# Altium PCB OFDMT1.PcbDoc (part 1 of 4)
Units mm, origin at the board's own origin, x right, y up, seen from the top; angles counter-clockwise.
Board outline 40.21 x 28.18 mm, 6 copper layers (Top Layer, GND1, SIGNAL, POWER, GND2, Bottom Layer), stack 1.436 mm thick; 295 components, 218 nets, 1362 pads, 709 vias.
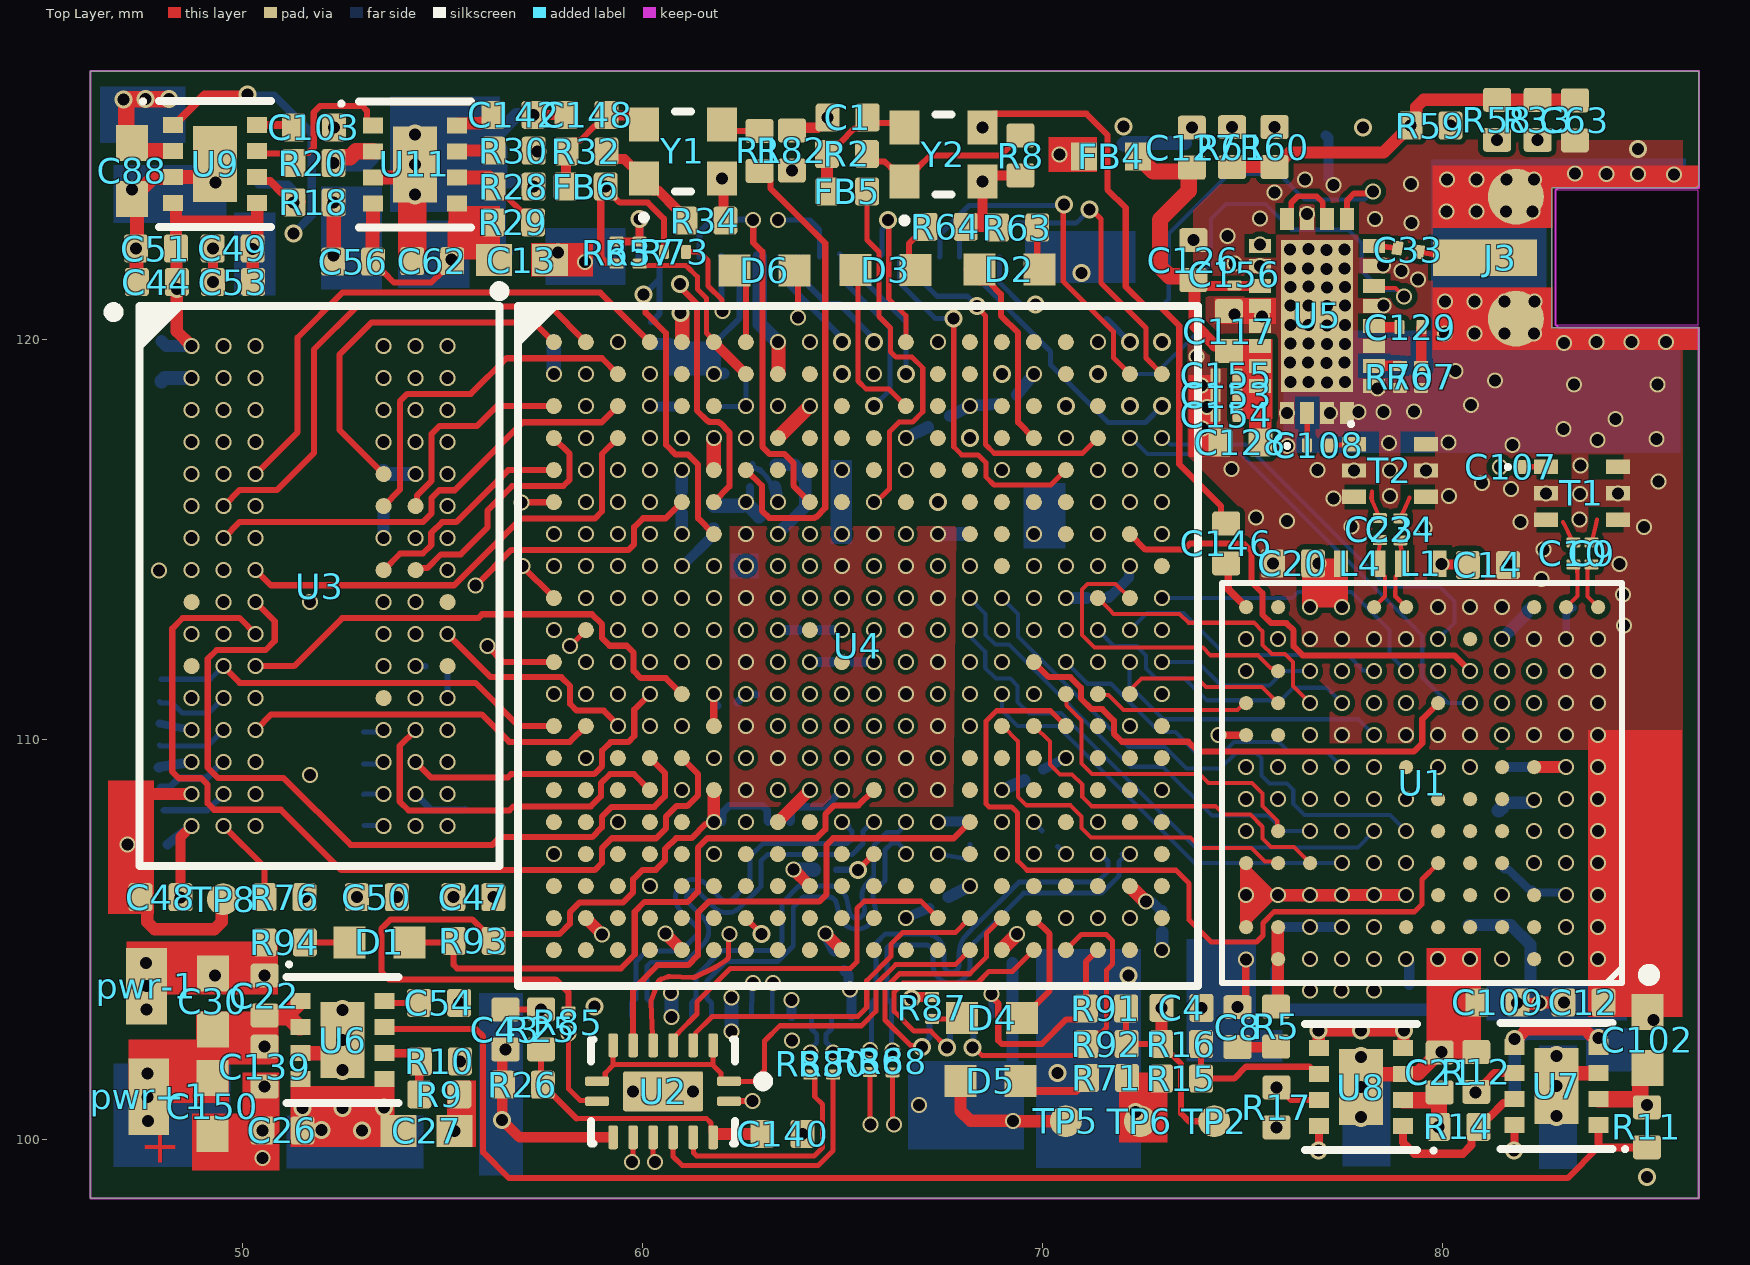
[diagram p0: Top Layer view]
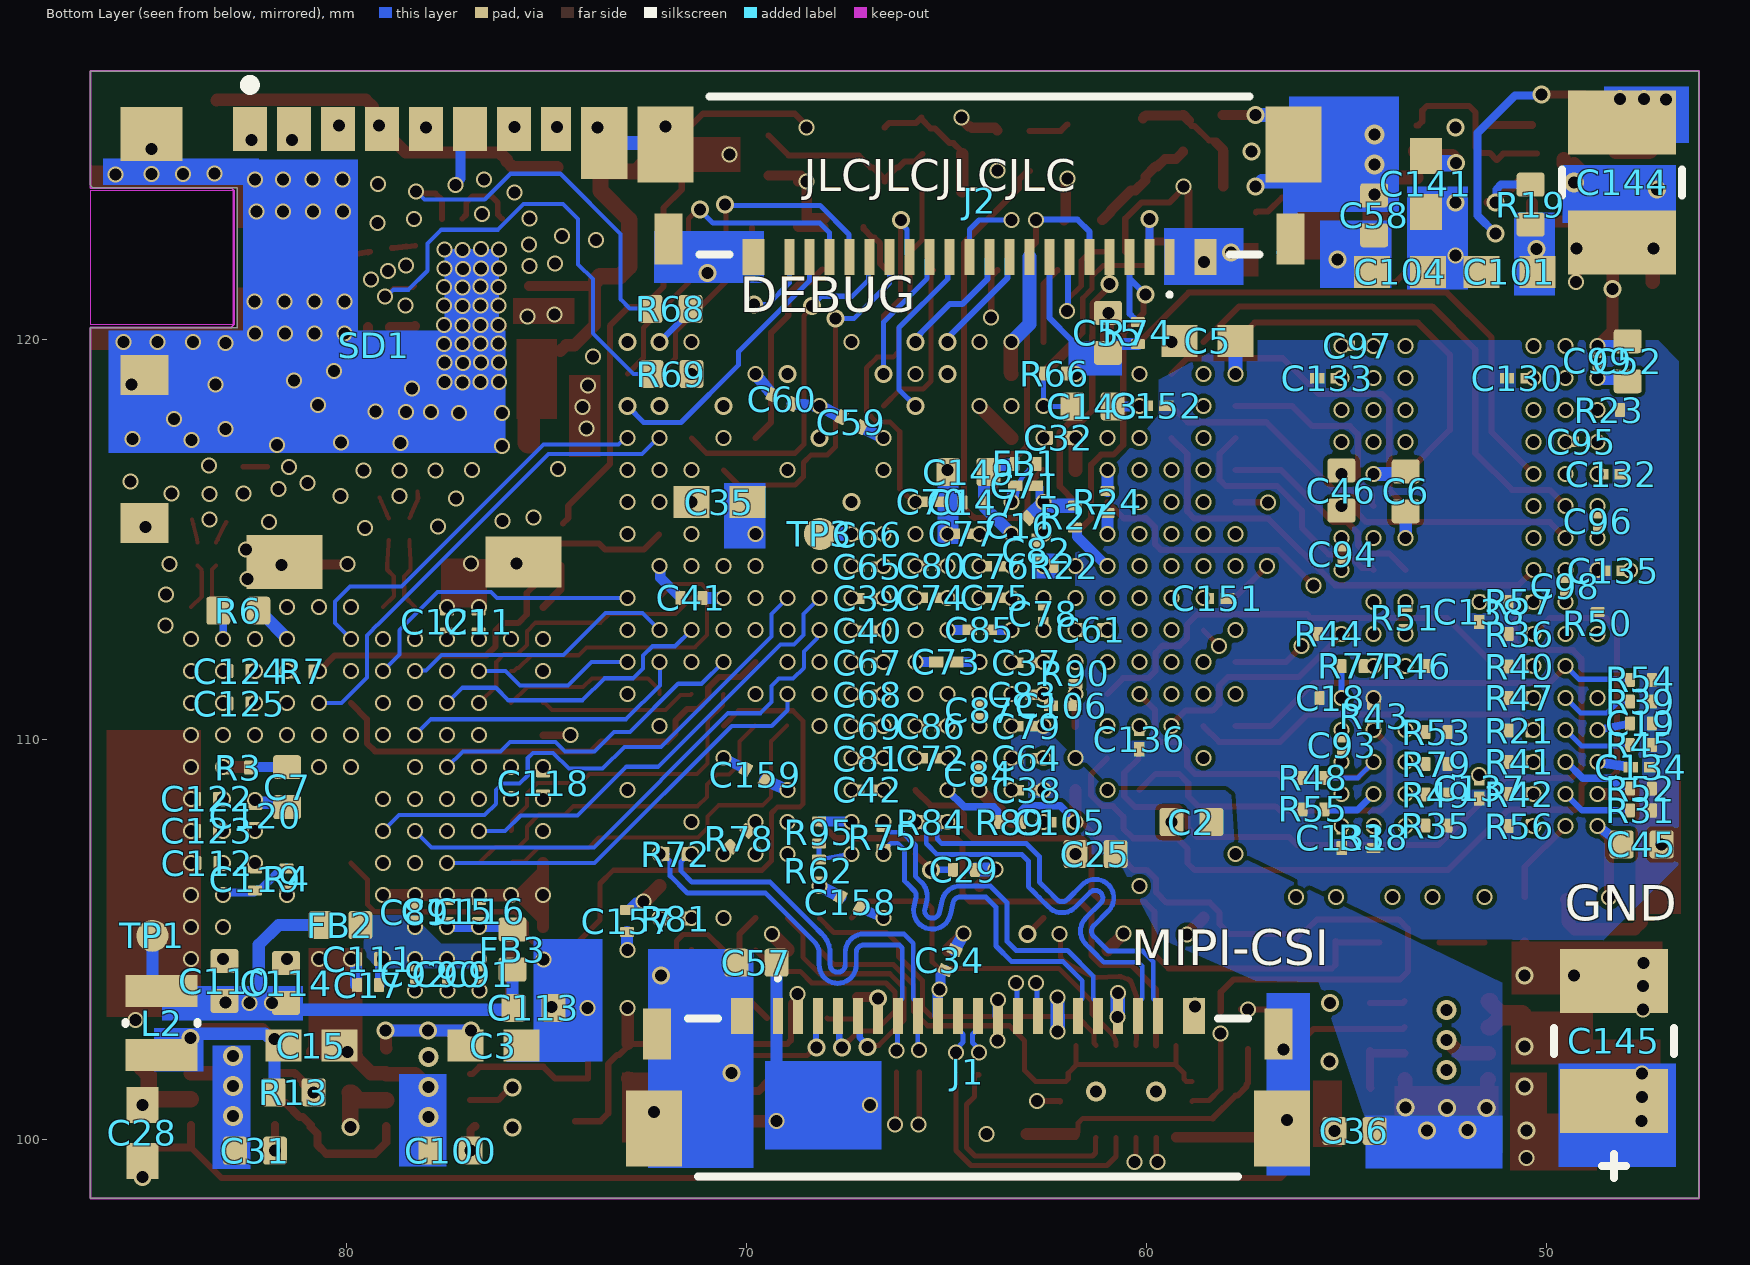
[diagram p1: Bottom Layer view, seen from below]
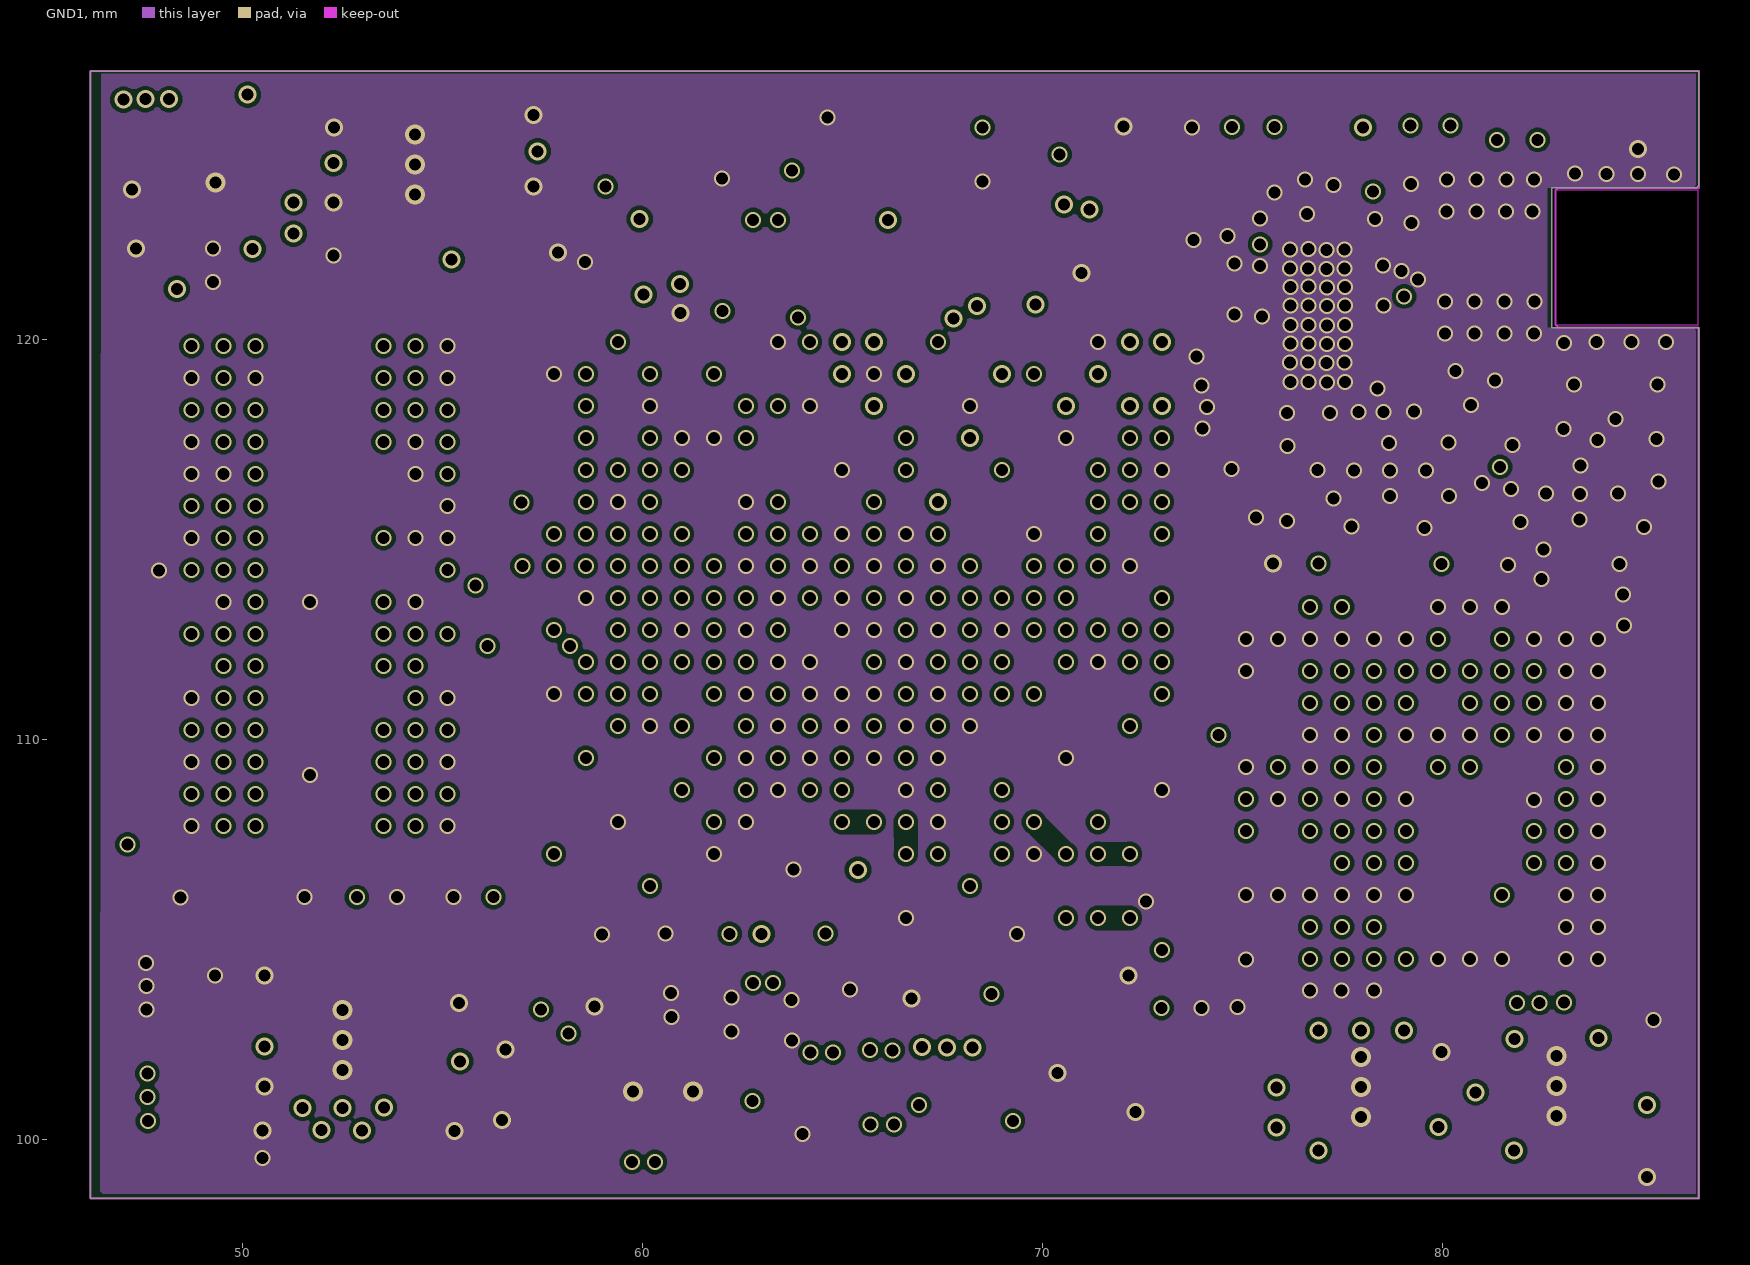
[diagram p2: GND1]
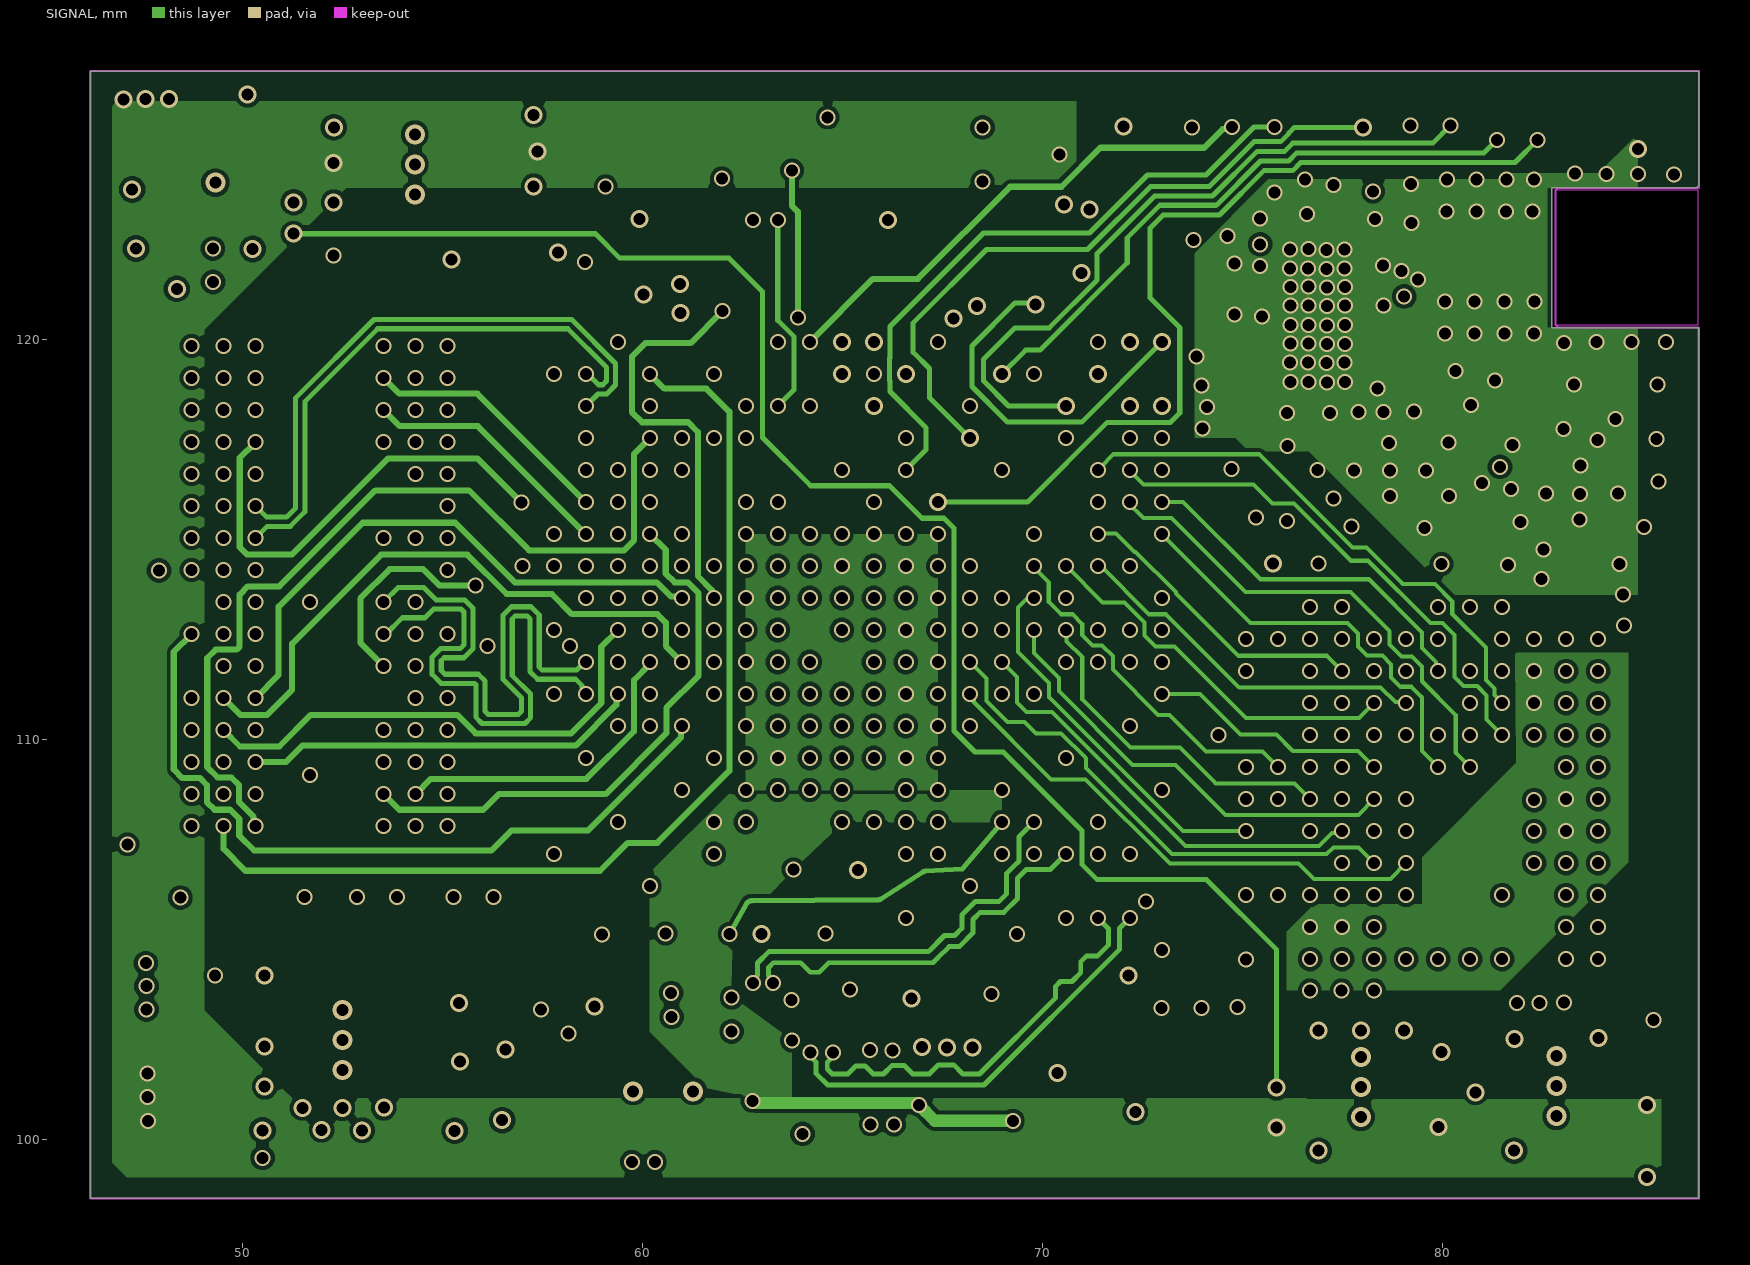
[diagram p3: SIGNAL]
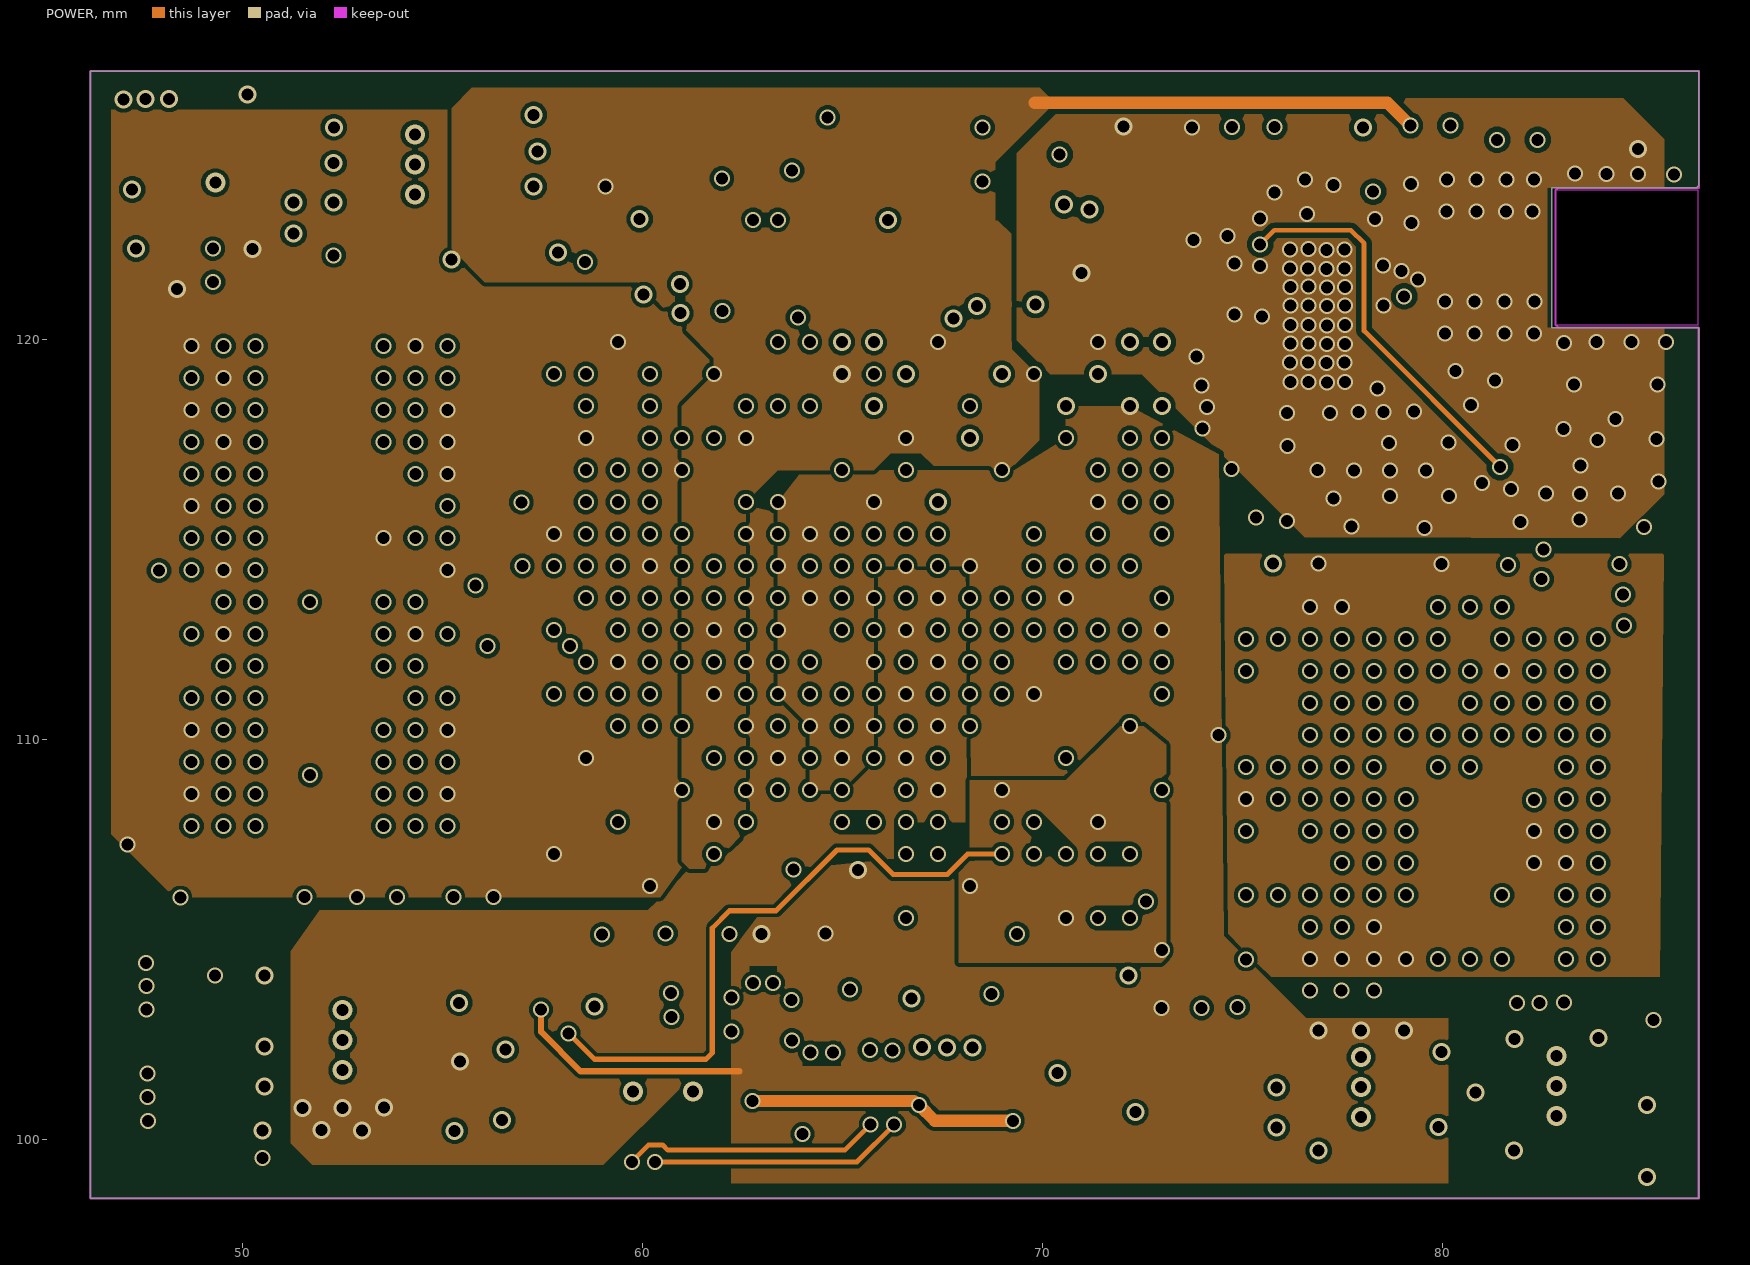
[diagram p4: POWER]
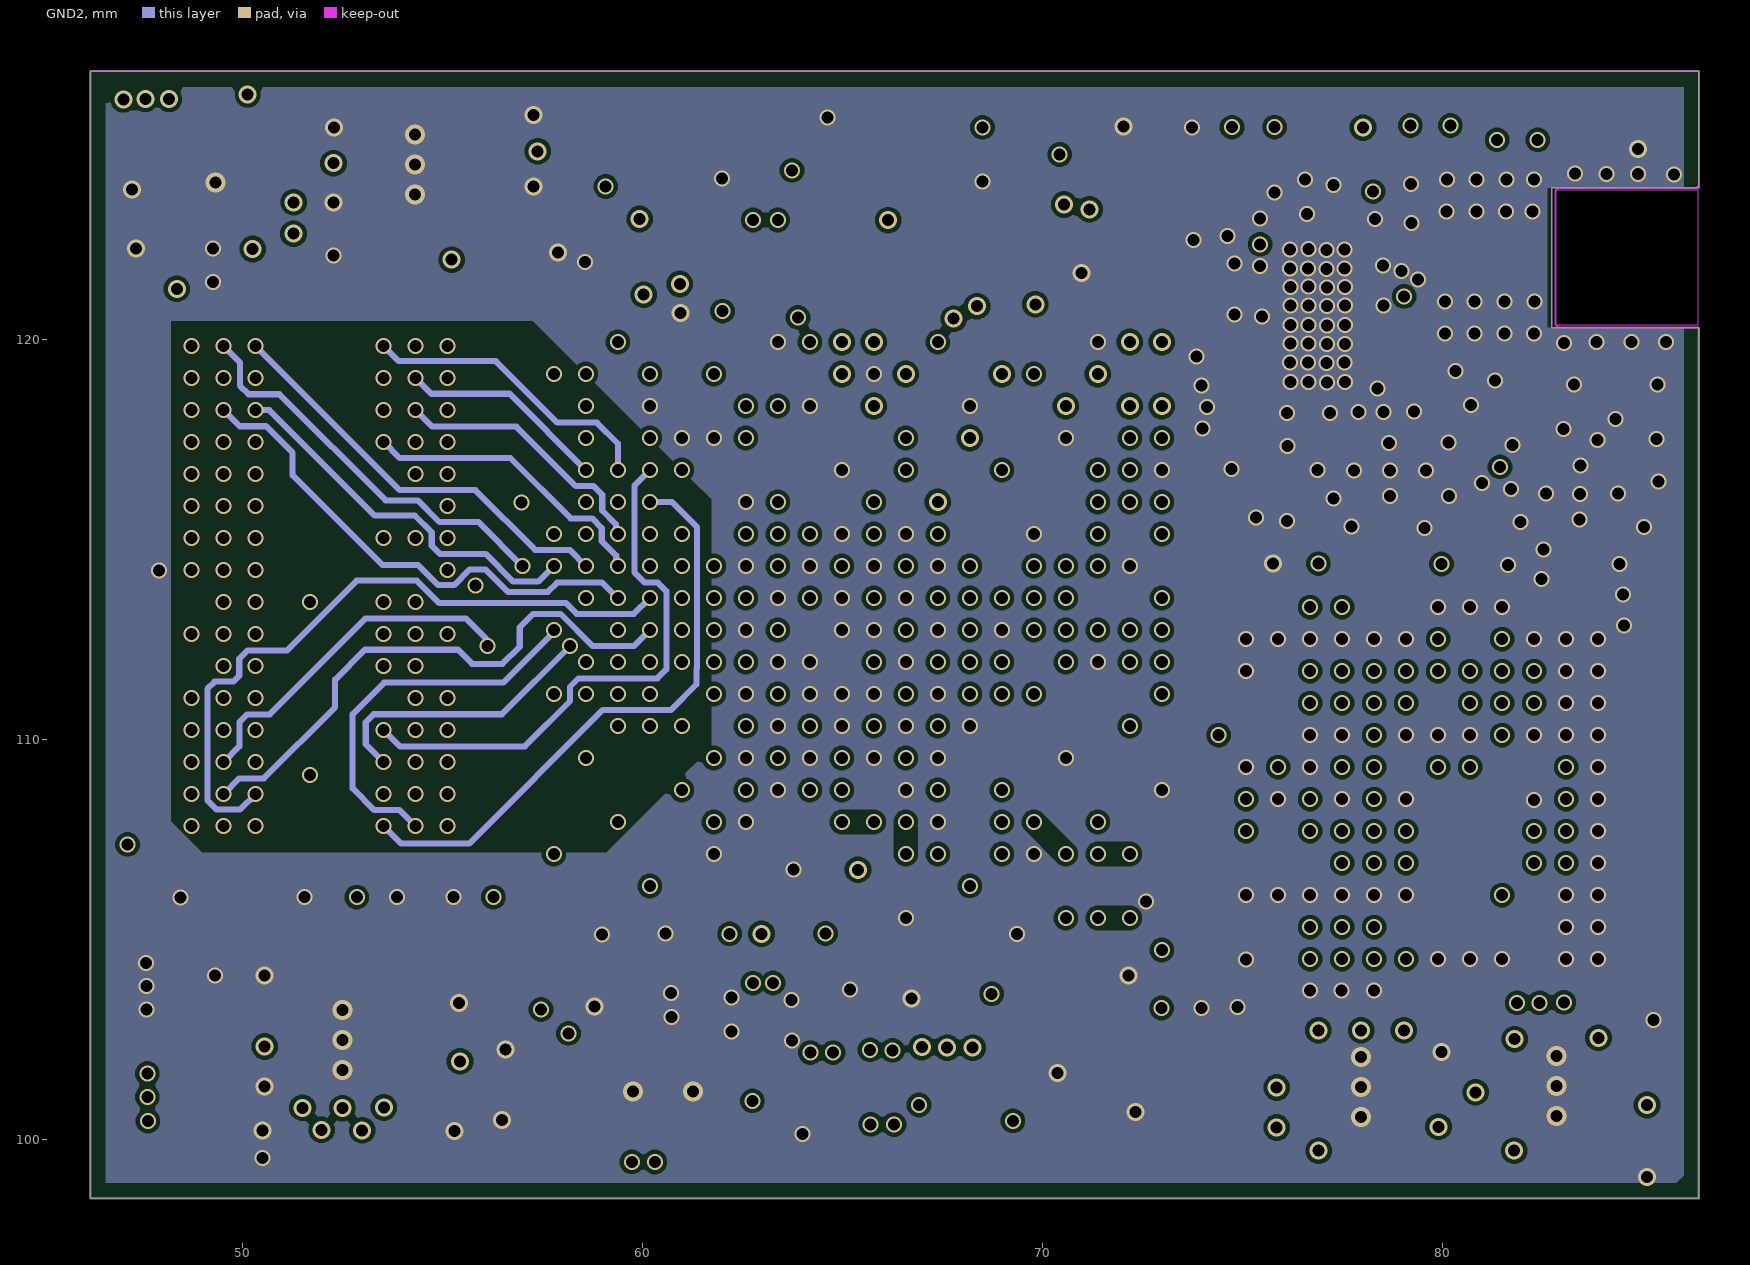
[diagram p5: GND2]
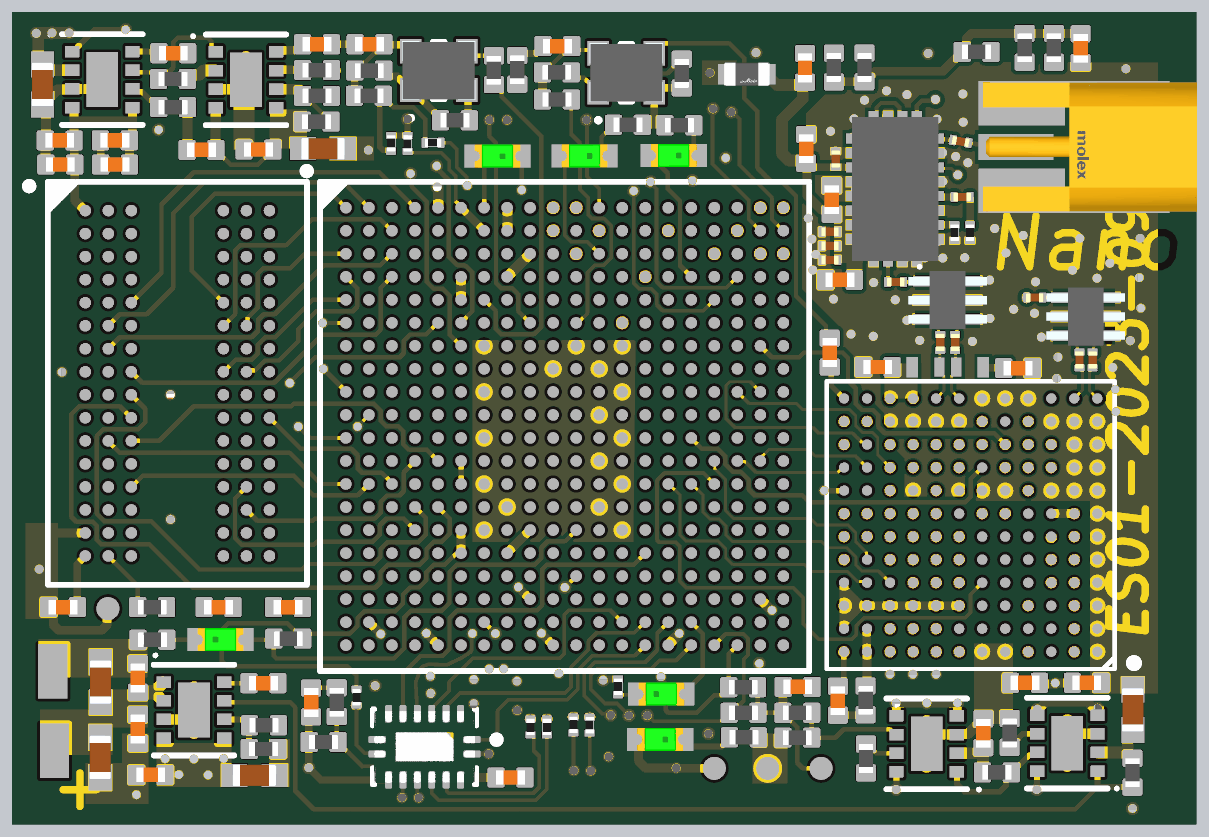
[diagram p8: 3D render of the assembled board from above, using the file's embedded part models]
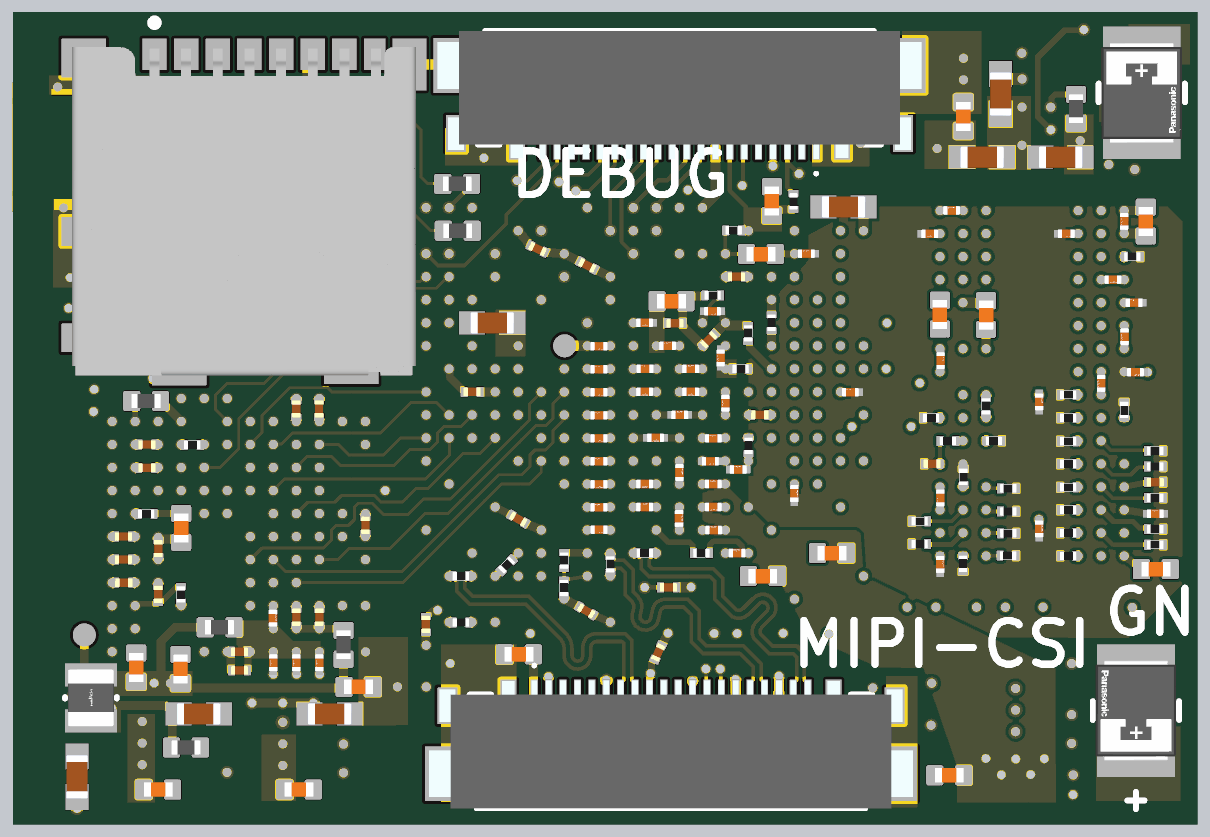
[diagram p9: 3D render of the assembled board from below, using the file's embedded part models]

## Layer stack, top to bottom
Top Solder: solder mask 0.0102, Solder Resist, Dk 3.5
Top Layer: signal copper 0.0356
Dielectric 2: prepreg 0.0711, PP-006, Dk 4.1
GND1: signal copper 0.035
Dielectric 4: prepreg 0.1411, PP-006, Dk 4.1
SIGNAL: signal copper 0.035
Dielectric 1: dielectric 0.8004, FR-4, Dk 4.8
POWER: signal copper 0.035
Dielectric 5: prepreg 0.1411, PP-006, Dk 4.1
GND2: signal copper 0.035
Dielectric 3: prepreg 0.0711, PP-006, Dk 4.1
Bottom Layer: signal copper 0.0356
Bottom Solder: solder mask 0.0102, Solder Resist, Dk 3.5

## Board outline
46.203,98.514 46.203,126.695 86.411,126.695 86.411,123.838 86.36,123.787 82.74,123.787 82.74,120.282 86.411,120.282 86.411,98.514

## Design rules (kind name [scope] priority, off if disabled: settings)
Clearance [InNamedPolygon('L1_CPWG')] p1: gap=0.127 ignorepadtopadclearanceinfootprint=TRUE except(0.152: Arc-Hole Track-Hole SMDPad-Hole THPad-Hole Via-Hole Fill-Hole Poly-Hole Region-Hole Text-Hole)
Clearance Clearance_2 [InNamedPolygon('L4_CPWG')] p2: gap=0.127 ignorepadtopadclearanceinfootprint=TRUE except(0.152: Arc-Hole Track-Hole SMDPad-Hole THPad-Hole Via-Hole Fill-Hole Poly-Hole Region-Hole Text-Hole)
Clearance Clearance_1 [All] p3: gap=0.102 ignorepadtopadclearanceinfootprint=FALSE except(0: Arc-Hole Track-Hole SMDPad-Hole THPad-Hole Via-Hole Fill-Hole Poly-Hole Region-Hole Text-Hole)
DiffPairsRouting [All] p1: maxlimit=0.254 minlimit=0.152 mostfreqgap=0.152 toplayer_minwidth=0.102 toplayer_maxwidth=0.254 toplayer_prefwidth=0.123 midlayer1_minwidth=0.102 midlayer1_maxwidth=0.254 midlayer1_prefwidth=0.123 midlayer2_minwidth=0.102 midlayer2_maxwidth=0.254 midlayer2_prefwidth=0.123 midlayer3_minwidth=0.102 midlayer3_maxwidth=0.254 midlayer3_prefwidth=0.123 midlayer4_minwidth=0.102 midlayer4_maxwidth=0.254 midlayer4_prefwidth=0.123 bottomlayer_minwidth=0.102 bottomlayer_maxwidth=0.254 bottomlayer_prefwidth=0.123 maxuncoupledlength=12.7
MinimumSolderMaskSliver [All] p1: minsoldermaskwidth=0.025
PolygonConnect [All] p1: connectstyle=Relief reliefconductorwidth=0.254 reliefentries=4 polygonreliefangle="90 Angle" airgapwidth=0.254
RoutingVias [All] p1: holewidth=0.711 width=1.27 viastyle="Through Hole" minholewidth=0.711 minwidth=1.27 maxholewidth=0.711 maxwidth=1.27
SilkToSolderMaskClearance [IsPad] p1: minsilkscreentomaskgap=0.025 clearancetoexposedcopper=TRUE
SolderMaskExpansion [All] p1: expansion=0.102 istentingtop=FALSE
Width [All] p1: maxlimit=5.08 minlimit=0.076 preferedwidth=0.191
27 further rules are at their usual default settings.

## Classes and differential pairs
component class DDRmem: C18 C19 R21 R22 R23 R24 R27 R31 R35 R36 R38 R39 R40 R41 R42 R43 R44 R45 R46 R47 R48 R49 R50 R51 R52 R53 R54 R55 R56 R57 R76 R77 R79 U3
component class Power: C2 C3 C4 C5 C6 C12 C13 C15 C21 C22 C25 C26 C27 C28 C29 C30 C31 C32 C34 C35 C36 C37 C38 C39 C40 C41 C42 C44 C45 C46 C47 C48 C49 C50 C51 C52 C53 C54 C55 C56 C57 C58 C59 C60 C61 C62 C63 C64 C65 C66 C67 C68 C69 C70 C71 C72 C73 C74 C75 C76 C77 C78 C79 C80 C81 C82 C83 C84 C85 C86 C87 C88 C89 C90 C91 C92 C93 C94 C95 C96 C97 C98 C99 C100 C101 C102 C103 C104 C105 C106 C130 C131 C132 C133 C134 C135 C136 C137 C138 C139 C141 C142 C144 C145 C150 C151 C152 C157 C158 C159 D5 L2 pwr+1 pwr-1 R9 R10 R11 R12 R13 R14 R15 R16 R17 R18 R19 R20 R28 R29 R30 R71 TP3 TP8 U6 U7 U8 U9 U11
component class CoreBoard: C1 C16 C43 C140 C143 C146 C147 C148 C149 D1 D2 D3 D4 D6 FB1 FB5 FB6 J1 J2 R1 R2 R8 R25 R26 R32 R33 R34 R37 R58 R59 R60 R61 R62 R63 R64 R65 R66 R72 R73 R74 R75 R78 R80 R81 R82 R83 R84 R85 R86 R87 R88 R89 R90 R91 R92 R93 R94 R95 SD1 TP5 TP6 U2 U4 Y1 Y2
component class RFFE: C9 C10 C23 C24 C33 C107 C108 C117 C126 C127 C128 C129 C153 C154 C155 C156 FB4 J3 R67 R68 R69 R70 T1 T2 U5
component class AD9361: C7 C8 C11 C14 C17 C20 C109 C110 C111 C112 C113 C114 C115 C116 C118 C119 C120 C121 C122 C123 C124 C125 FB2 FB3 L1 L4 R3 R4 R5 R6 R7 TP1 TP2 U1
differential pair MIPI_D0: +MIPI_D0_P -MIPI_D0_N
differential pair MIPI_D1: +MIPI_D1_P -MIPI_D1_N
differential pair MIPI_D2: +MIPI_D2_P -MIPI_D2_N
differential pair MIPI_D3: +MIPI_D3_P -MIPI_D3_N
differential pair MIPI_CLK0: +MIPI_CLK0_P -MIPI_CLK0_N
differential pair RX1A: +RX1A_P -RX1A_N
differential pair TX1A: +TX1A_P -TX1A_N
differential pair AD9361_TX1A: +AD9361_TX1A_P -AD9361_TX1A_N
differential pair AD9361_RX1A: +AD9361_RX1A_P -AD9361_RX1A_N

## Components (designator, comment, footprint, x,y, rotation, side; value= is the part's Value field where it differs from the comment)
C1 "100nF" CAP_0402 65.134,125.539 r180 top
C2 "100nF" CAP_0402 58.887,107.924 r0 bottom
C3 "22uf" CAP_0603 76.34,102.337 r0 bottom
C4 "100nF" CAP_0402 73.482,103.276 r0 top
C5 "22uf" CAP_0603 58.483,119.951 r0 bottom
C6 "100nF" CAP_0402 53.53,116.192 r90 bottom
C7 "1uF" CAP_0402 81.496,108.796 r90 bottom
C8 "1uF" CAP_0402 74.879,102.794 r270 top
C9 "18pF" CAP_0201 83.731,114.638 r270 top
C10 "18pF" CAP_0201 83.274,114.638 r270 top
C11 "1nF" CAP_0201 76.706,112.937 r90 bottom
C12 "100nF" CAP_0402 83.528,103.416 r0 top
C13 "22uf" CAP_0603 56.991,121.974 r180 top
C14 "10uF" CAP_0402 81.14,114.351 r180 top
C15 "22uf" CAP_0603 80.885,102.337 r0 bottom
C16 "1uF" CAP_0201 63.162,115.33 r135 bottom
C17 "1nF" CAP_0201 79.472,103.848 r180 bottom
C18 "1uF" CAP_0201 55.406,111.024 r180 bottom
C19 "1uF" CAP_0201 47.65,110.389 r180 bottom
C20 "10uF" CAP_0402 76.263,114.389 r0 top
C21 "100nF" CAP_0402 79.934,101.663 r90 top
C22 "100nF" CAP_0402 50.559,103.586 r90 top
C23 "18pF" CAP_0201 78.436,115.245 r270 top
C24 "18pF" CAP_0201 78.954,115.244 r270 top
C25 "100nF" CAP_0402 61.287,107.124 r0 bottom
C26 "100nF" CAP_0402 51.003,100.216 r180 top
C27 "22uf" CAP_0603 54.61,100.203 r180 top
C28 "10uf" CAP_0603 85.115,100.151 r90 bottom
C29 "100nF" CAP_0201 64.567,106.731 r180 bottom
C30 "10uf" CAP_0603 49.263,103.443 r270 top
C31 "3.3nf" CAP_0402 82.296,99.708 r180 bottom
C32 "100nF" CAP_0201 62.202,117.53 r180 bottom
C33 "18pF" CAP_0201 79.148,122.227 r170 top
C34 "100nF" CAP_0201 64.922,104.47 r295 bottom
C35 "22uf" CAP_0603 70.687,115.924 r0 bottom
C36 "100nF" CAP_0402 54.81,100.203 r0 bottom
C37 "GRM033R61A104KE15D" FP-GRM033-0_03-IPC_C 63.005,111.912 r0 bottom
C38 "GRM033R61A104KE15D" FP-GRM033-0_03-IPC_C 62.992,108.725 r0 bottom
C39 "GRM033R61A104KE15D" FP-GRM033-0_03-IPC_C 66.98,113.513 r180 bottom
C40 "GRM033R61A104KE15D" FP-GRM033-0_03-IPC_C 66.98,112.711 r0 bottom
C41 "100nF" CAP_0201 71.387,113.525 r0 bottom
C42 "GRM033R61A104KE15D" FP-GRM033-0_03-IPC_C 66.98,108.737 r180 bottom
C43 "10uf" CAP_0402 56.578,102.735 r270 top
C44 "100nF" CAP_0402 47.862,121.425 r180 top
C45 "100nF" CAP_0402 47.63,107.366 r0 bottom
C46 "100nF" CAP_0402 55.136,116.21 r270 bottom
C47 "100nF" CAP_0402 55.774,106.045 r180 top locked
C48 "100nF" CAP_0402 47.955,106.045 r0 top
C49 "100nF" CAP_0402 49.759,122.263 r180 top
C50 "100nF" CAP_0402 53.361,106.045 r0 top locked
C51 "100nF" CAP_0402 47.84,122.261 r180 top
C52 "100nF" CAP_0402 47.981,119.444 r270 bottom
C53 "100nF" CAP_0402 49.767,121.425 r180 top
C54 "3.3nf" CAP_0402 54.919,103.403 r180 top
C55 "100nF" CAP_0402 60.973,120.155 r90 bottom
C56 "100nF" CAP_0402 52.769,121.932 r180 top
C57 "100nF" CAP_0402 69.761,104.407 r0 bottom
C58 "100nF" CAP_0402 54.318,123.093 r90 bottom
C59 "100nF" CAP_0201 67.386,117.919 r27 bottom
C60 "100nF" CAP_0201 69.113,118.491 r205 bottom
C61 "100nF" CAP_0201 61.392,112.725 r180 bottom
C62 "100nF" CAP_0402 54.746,121.945 r180 top
C63 "100nF" CAP_0402 83.315,125.466 r270 top
C64 "GRM033R61A104KE15D" FP-GRM033-0_03-IPC_C 63.005,109.525 r180 bottom
C65 "GRM033R61A104KE15D" FP-GRM033-0_03-IPC_C 66.98,114.312 r0 bottom
C66 "GRM033R61A104KE15D" FP-GRM033-0_03-IPC_C 66.98,115.112 r180 bottom
C67 "GRM033R61A104KE15D" FP-GRM033-0_03-IPC_C 66.98,111.912 r180 bottom
C68 "GRM033R61A104KE15D" FP-GRM033-0_03-IPC_C 66.98,111.111 r0 bottom
C69 "GRM033R61A104KE15D" FP-GRM033-0_03-IPC_C 66.98,110.311 r180 bottom
C70 "GRM033R61A104KE15D" FP-GRM033-0_03-IPC_C 65.392,115.926 r180 bottom
C71 "GRM033R61A104KE15D" FP-GRM033-0_03-IPC_C 63.034,116.327 r180 bottom
C72 "GRM033R61A104KE15D" FP-GRM033-0_03-IPC_C 65.392,109.525 r0 bottom
C73 "GRM033R61A104KE15D" FP-GRM033-0_03-IPC_C 65.011,111.925 r180 bottom
C74 "GRM033R61A104KE15D" FP-GRM033-0_03-IPC_C 65.392,113.525 r180 bottom
C75 "GRM033R61A104KE15D" FP-GRM033-0_03-IPC_C 63.792,113.525 r180 bottom
C76 "GRM033R61A104KE15D" FP-GRM033-0_03-IPC_C 63.792,114.324 r0 bottom
C77 "GRM033R61A104KE15D" FP-GRM033-0_03-IPC_C 64.592,115.126 r0 bottom
C78 "GRM033R61A104KE15D" FP-GRM033-0_03-IPC_C 62.586,113.132 r270 bottom
C79 "GRM033R61A104KE15D" FP-GRM033-0_03-IPC_C 63.004,110.325 r0 bottom
C80 "GRM033R61A104KE15D" FP-GRM033-0_03-IPC_C 65.38,114.325 r0 bottom
C81 "GRM033R61A104KE15D" FP-GRM033-0_03-IPC_C 66.98,109.512 r0 bottom
C82 "GRM033R61A104KE15D" FP-GRM033-0_03-IPC_C 62.751,114.706 r270 bottom
C83 "GRM033R61A104KE15D" FP-GRM033-0_03-IPC_C 63.106,111.112 r180 bottom
C84 "GRM033R61A104KE15D" FP-GRM033-0_03-IPC_C 64.198,109.131 r90 bottom
C85 "GRM033R61A104KE15D" FP-GRM033-0_03-IPC_C 64.173,112.725 r0 bottom
C86 "GRM033R61A104KE15D" FP-GRM033-0_03-IPC_C 65.392,110.325 r180 bottom
C87 "GRM033R61A104KE15D" FP-GRM033-0_03-IPC_C 64.182,110.724 r90 bottom
C88 "10uf" CAP_0603 47.244,124.206 r90 top
C89 "GRM033R61A104KE15D" FP-GRM033-0_03-IPC_C 78.308,105.664 r90 bottom
C90 "GRM033R61A104KE15D" FP-GRM033-0_03-IPC_C 77.495,104.115 r270 bottom
C91 "GRM033R61A104KE15D" FP-GRM033-0_03-IPC_C 76.695,104.115 r270 bottom
C92 "GRM033R61A104KE15D" FP-GRM033-0_03-IPC_C 78.295,104.115 r270 bottom
C93 "GRM033R61A104KE15D" FP-GRM033-0_03-IPC_C 55.119,109.839 r270 bottom
C94 "GRM033R61A104KE15D" FP-GRM033-0_03-IPC_C 55.108,114.613 r90 bottom
C95 "GRM033R61A104KE15D" FP-GRM033-0_03-IPC_C 49.123,117.427 r180 bottom
C96 "GRM033R61A104KE15D" FP-GRM033-0_03-IPC_C 48.719,115.44 r270 bottom
C97 "GRM033R61A104KE15D" FP-GRM033-0_03-IPC_C 54.726,119.829 r0 bottom
C98 "GRM033R61A104KE15D" FP-GRM033-0_03-IPC_C 49.535,113.822 r270 bottom
C99 "GRM033R61A104KE15D" FP-GRM033-0_03-IPC_C 48.73,119.451 r270 bottom
C100 "3.3nf" CAP_0402 77.406,99.708 r180 bottom
C101 "22uf" CAP_0603 50.939,121.678 r180 bottom
C102 "10uf" CAP_0603 85.128,102.478 r270 top
C103 "3.3nf" CAP_0402 51.788,125.293 r180 top
C104 "22uf" CAP_0603 53.669,121.679 r0 bottom
C105 "GRM033R61A104KE15D" FP-GRM033-0_03-IPC_C 62.179,107.925 r0 bottom
C106 "GRM033R61A104KE15D" FP-GRM033-0_03-IPC_C 62.141,110.829 r0 bottom
C107 "18pF" CAP_0201 81.716,116.802 r180 top
C108 "18pF" CAP_0201 76.89,117.343 r180 top
C109 "0.1uF" CAP_0402 81.382,103.416 r180 top
C110 "10uF" CAP_0402 83.058,103.95 r270 bottom
C111 "0.1uF" CAP_0201 79.472,104.496 r0 bottom
C112 "10uF" CAP_0201 83.49,106.896 r180 bottom
C113 "0.1uF" CAP_0402 75.336,103.276 r180 bottom
C114 "10uF" CAP_0402 81.521,103.899 r270 bottom
C115 "0.1uF" CAP_0201 77.495,105.695 r90 bottom
C116 "10uF" CAP_0201 76.695,105.695 r270 bottom
C117 "10uF" CAP_0402 74.663,120.197 r90 top
C118 "0.1uF" CAP_0201 75.095,108.89 r90 bottom
C119 "10uF" CAP_0201 82.296,106.489 r90 bottom
C120 "0.1uF" CAP_0201 82.29,108.079 r90 bottom
C121 "10uF" CAP_0201 77.499,112.935 r90 bottom
C122 "0.1uF" CAP_0201 83.499,108.501 r0 bottom
C123 "10uF" CAP_0201 83.499,107.7 r180 bottom
C124 "0.1uF" CAP_0201 82.69,111.697 r0 bottom
C125 "10uF" CAP_0201 82.69,110.884 r180 bottom
C126 "10uF" CAP_0402 73.774,121.971 r90 top
C127 "10uF" CAP_0402 73.736,124.782 r90 top
C128 "10uF" CAP_0402 74.952,117.414 r180 top
C129 "18pF" CAP_0201 79.199,120.295 r180 top
C130 "GRM033R61A104KE15D" FP-GRM033-0_03-IPC_C 50.739,119.019 r180 bottom
C131 "GRM033R61A104KE15D" FP-GRM033-0_03-IPC_C 55.124,107.532 r90 bottom
C132 "GRM033R61A104KE15D" FP-GRM033-0_03-IPC_C 48.387,116.624 r0 bottom
C133 "GRM033R61A104KE15D" FP-GRM033-0_03-IPC_C 55.488,119.017 r180 bottom
C134 "GRM033R61A104KE15D" FP-GRM033-0_03-IPC_C 47.648,109.291 r0 bottom
C135 "GRM033R61A104KE15D" FP-GRM033-0_03-IPC_C 48.336,114.211 r180 bottom
C136 "GRM033R61A104KE15D" FP-GRM033-0_03-IPC_C 60.191,109.997 r90 bottom
C137 "GRM033R61A104KE15D" FP-GRM033-0_03-IPC_C 51.688,108.766 r90 bottom
C138 "GRM033R61A104KE15D" FP-GRM033-0_03-IPC_C 51.688,113.176 r90 bottom
C139 "100nF" CAP_0402 50.559,101.811 r270 top
C140 "10uf" CAP_0402 63.505,100.127 r0 top
C141 "10uf" CAP_0603 53.023,123.876 r90 bottom
C142 "3.3nf" CAP_0402 56.782,125.602 r180 top
C143 "0.1uf" CAP_0402 61.354,118.313 r180 bottom
C144 "6TPE220MAZB" FP-TPEB2-MFG 48.12,123.914 r90 bottom
C145 "6TPE220MAZB" FP-TPEB2-MFG 48.323,102.452 r270 bottom
C146 "100nF" CAP_0402 74.597,114.889 r270 top
C147 "1uF" CAP_0201 64.338,115.913 r0 bottom
C148 "100nF" CAP_0402 58.606,125.603 r0 top
C149 "10uf" CAP_0402 64.459,116.675 r0 bottom
C150 "10uf" CAP_0603 49.251,100.824 r90 top
C151 "GRM033R61A104KE15D" FP-GRM033-0_03-IPC_C 58.242,113.513 r0 bottom
C152 "GRM033R61A104KE15D" FP-GRM033-0_03-IPC_C 59.772,118.327 r0 bottom
C153 "1uf" CAP_0201 74.601,118.597 r0 top
C154 "1uf" CAP_0201 74.601,118.106 r0 top
C155 "1uf" CAP_0201 74.601,119.088 r0 top
C156 "1uf" CAP_0201 74.803,121.615 r270 top
C157 "100nF" CAP_0201 72.996,105.448 r90 bottom
C158 "100nF" CAP_0201 67.421,105.916 r210 bottom
C159 "100nF" CAP_0201 69.787,109.106 r30 bottom
D1 "Blue" FP-LTST-C190GKT-MFG 53.43,104.915 r0 top locked
D2 "LTST-C190GKT" FP-LTST-C190GKT-MFG 69.178,121.738 r180 top
D3 "LTST-C190GKT" FP-LTST-C190GKT-MFG 66.081,121.727 r180 top
D4 "LTST-C190GKT" FP-LTST-C190GKT-MFG 68.744,103.022 r0 top
D5 "LTST-C190GKT" FP-LTST-C190GKT-MFG 68.706,101.448 r180 top
D6 "LTST-C190GKT" FP-LTST-C190GKT-MFG 63.055,121.717 r180 top
FB1 "330R" RES_0201 63.03,116.878 r0 bottom
FB2 "BLM15PX331SN1D" RES_0402 80.162,105.346 r180 bottom
FB3 "BLM15PX331SN1D" RES_0402 75.857,104.737 r90 bottom
FB4 "BLM18PG471SN1D" FP-BLM18-0_15-t0_8-MFG 71.719,124.562 r0 top
FB5 "BLM15PX331SN1D" RES_0402 65.118,123.685 r180 top
FB6 "BLM15PX331SN1D" RES_0402 58.585,123.812 r180 top
J1 "20455-A20E-76" 20455A20E76 64.478,101.067 r180 bottom locked
J2 "20455-A20E-76" 20455A20E76 64.184,124.057 r0 bottom locked
J3 "73415-0961" FP-73415-0961-MFG 85.049,122.034 r180 top locked
L1 "0402DC-30NXGRW" "0402DC SERIES" 79.46,114.383 r180 top locked
L2 "DFE201610E 0.24uh" FP-DFE201610C-MFG 84.633,102.895 r90 bottom
L4 "0402DC-30NXGRW" "0402DC SERIES" 77.936,114.383 r0 top locked
pwr+1 "HDR1" HDR1 48.263,99.954 r90 top
pwr-1 "HDR1" HDR1 48.203,102.719 r90 top
R1 "24.9R" RES_0402 62.928,124.701 r270 top
R2 "DNI" RES_0402 65.113,124.625 r180 top
R3 "Resistor" RES_0201 82.717,109.286 r0 bottom value=1R
R4 "Resistor" RES_0201 81.508,106.49 r90 bottom value=0R
R5 "Resistor" RES_0402 75.844,102.808 r90 top value=1R
R6 "Resistor" RES_0402 82.715,113.208 r180 bottom value=14.3K
R7 "Resistor" RES_0201 81.115,111.684 r0 bottom value=10K
R8 "0R" RES_0402 69.456,124.587 r90 top
R9 "100K" RES_0402 54.927,101.117 r0 top
R10 "25K" RES_0402 54.94,101.943 r180 top
R11 "47K" RES_0402 85.115,100.292 r270 top
R12 "100K" RES_0402 80.848,101.676 r90 top
R13 "62.5K" RES_0402 81.331,101.169 r180 bottom
R14 "47K" RES_0402 80.404,100.305 r0 top
R15 "100K" RES_0402 73.469,101.511 r180 top
R16 "124K" RES_0402 73.469,102.375 r0 top
R17 "47K" RES_0402 75.857,100.787 r90 top
R18 "100K" RES_0402 51.783,123.419 r0 top
R19 "87.5K" RES_0402 50.406,123.36 r90 bottom
R20 "47K" RES_0402 51.778,124.396 r180 top
R21 "40R" RES_0201 50.681,110.211 r0 bottom
R22 "1k" RES_0201 62.062,114.324 r0 bottom
R23 "1k" RES_0201 48.446,118.224 r180 bottom
R24 "80.2" RES_0201 60.984,115.927 r270 bottom
R25 "1k" RES_0402 57.468,102.743 r270 top
R26 "2k" RES_0402 57.01,101.359 r180 top
R27 "80.2" RES_0201 61.798,115.557 r270 bottom
R28 "100K" RES_0402 56.782,123.811 r0 top
R29 "312.5K" RES_0402 56.768,122.916 r0 top
R30 "47K" RES_0402 56.782,124.707 r180 top
R31 "40R" RES_0201 47.65,108.213 r180 bottom
R32 "DNI" RES_0402 58.598,124.689 r180 top
R33 "10k" RES_0402 82.385,125.481 r270 top
R34 "0R" RES_0402 61.574,122.961 r180 top
R35 "40R" RES_0201 52.764,107.836 r180 bottom
R36 "40R" RES_0201 50.681,112.624 r0 bottom
R37 "10k" RES_0201 59.931,122.157 r90 top
R38 "40R" RES_0201 54.331,107.549 r270 bottom
R39 "40R" RES_0201 47.65,110.933 r180 bottom
R40 "40R" RES_0201 50.681,111.811 r0 bottom
R41 "40R" RES_0201 50.681,109.424 r0 bottom
R42 "40R" RES_0201 50.681,108.624 r0 bottom
R43 "40R" RES_0201 54.318,110.575 r90 bottom
R44 "40R" RES_0201 55.444,112.624 r0 bottom
R45 "40R" RES_0201 47.65,109.845 r180 bottom
R46 "40R" RES_0201 53.255,111.824 r180 bottom
R47 "40R" RES_0201 50.681,111.024 r0 bottom
R48 "40R" RES_0201 55.838,109.029 r0 bottom
R49 "40R" RES_0201 52.756,108.61 r180 bottom
R50 "40R" RES_0201 48.73,112.899 r90 bottom
R51 "80R" RES_0201 53.537,113.022 r270 bottom
R52 "40R" RES_0201 47.65,108.757 r180 bottom
R53 "40R" RES_0201 52.757,110.171 r180 bottom
R54 "40R" RES_0201 47.65,111.477 r180 bottom
R55 "40R" RES_0201 55.838,108.242 r0 bottom
R56 "40R" RES_0201 50.681,107.824 r0 bottom
R57 "40R" RES_0201 50.681,113.424 r0 bottom
R58 "10k" RES_0402 81.369,125.481 r90 top
R59 "10k" RES_0402 79.701,125.336 r180 top
R60 "10k" RES_0402 75.806,124.798 r270 top
R61 "10k" RES_0402 74.741,124.794 r270 top
R62 "1k" RES_0201 68.199,106.71 r270 bottom
R63 "2k" RES_0402 69.372,122.787 r0 top
R64 "2k" RES_0402 67.584,122.805 r180 top
R65 "10k" RES_0201 59.36,122.161 r270 top
R66 "10K" RES_0201 62.3,119.136 r180 bottom
R67 "Resistor" RES_0201 79.47,119.055 r270 top value=50R
R68 "0R" RES_0402 71.907,120.752 r0 bottom
R69 "0R" RES_0402 71.887,119.124 r0 bottom
R70 "Resistor" RES_0201 78.937,119.055 r270 top value=10K
R71 "2k" RES_0402 71.615,101.524 r180 top
R72 "150R" RES_0201 71.78,107.124 r0 bottom
R73 "4.7k" RES_0201 60.815,122.18 r0 top
R74 "4.7k" RES_0201 60.223,120.146 r90 bottom
R75 "150R" RES_0201 66.586,107.531 r270 bottom
R76 "4.7k" RES_0402 51.054,106.045 r180 top locked
R77 "240R" RES_0201 54.856,111.819 r180 bottom
R78 "150R" RES_0201 70.186,107.503 r315 bottom
R79 "40R" RES_0201 52.757,109.371 r180 bottom
R80 "24.9R" RES_0201 64.77,101.884 r90 top
R81 "150R" RES_0201 71.78,105.512 r0 bottom
R82 "2k" RES_0402 63.74,124.715 r270 top
R83 "24.9R" RES_0201 64.198,101.884 r90 top
R84 "150R" RES_0201 65.383,107.922 r180 bottom
R85 "10K" RES_0201 58.153,102.916 r90 top
R86 "24.9R" RES_0201 65.691,101.952 r270 top
R87 "0R" RES_0201 67.246,103.276 r270 top
R88 "24.9R" RES_0201 66.256,101.943 r270 top
R89 "4.7k" RES_0201 63.419,107.924 r180 bottom
R90 "4.7k" RES_0201 61.787,111.649 r270 bottom
R91 "4.7k" RES_0402 71.59,103.264 r180 top
R92 "4.7k" RES_0402 71.603,102.375 r180 top
R93 "330R" RES_0402 55.783,104.953 r0 top locked
R94 "2k" RES_0402 51.062,104.915 r0 top locked
R95 "DNP" RES_0201 68.191,107.665 r270 bottom
SD1 "104031-0811" MOLX-104031-0811_V 79.312,119.84 r0 bottom locked
T1 "NCS1-63+" NCS163 83.49,116.141 r270 top
T2 "NCS1-63+" NCS163 78.689,116.713 r270 top
TP1 "TEST" "TEST 0.8" 84.861,105.08 r90 bottom
TP2 "TEST" "TEST 0.8" 74.295,100.444 r90 top
TP3 "TEST" "TEST 0.8" 68.174,115.126 r90 bottom
TP5 "TEST" "TEST 0.8" 70.587,100.444 r90 top
TP6 "TEST" "TEST 0.8" 72.441,100.444 r90 top
TP8 "TEST" "TEST 0.8" 49.517,105.994 r90 top
U1 "AD9361" AD936X 80.415,108.675 r180 top locked
U2 "SN74AXC4T774BQB" FP-BQB0016A-MFG 60.519,101.192 r270 top
U3 "MT41J256M16HA-125:E" MICT-HA-96 51.931,113.824 r0 top locked
U4 "XC7Z010-1CLG400I" CLG400 65.387,112.324 r0 top locked
U5 "SKY85747-11" SKY8574711 76.869,120.578 r90 top locked
U6 "TPS82130SILT" SIL0008D_V 52.506,102.469 r0 top
U7 "TPS82130SILT" SIL0008D_V 82.851,101.321 r180 top
U8 "TPS82130SILT" SIL0008D_V 77.965,101.295 r180 top
U9 "TPS82130SILT" SIL0008D_V 49.323,124.376 r0 top
U11 "TPS82130SILT" SIL0008D_V 54.314,124.366 r0 top
Y1 "DSB221SDN-48.000MHZ" DSB221SDN48000MHZ 61.011,124.689 r0 top locked
Y2 "DSB221SDN-48.000MHZ" DSB221SDN48000MHZ 67.529,124.614 r0 top

## Footprints (in the part's own frame and the unit in brackets; to place one, negate y for a bottom-side part, rotate by r counter-clockwise, add the part's x,y. Pads: shape width x height; smd on the part's side, far side on the other; paste and mask are expansions set on the pad)
"0402DC SERIES" [mm] "Coilcraft Chip Inductor"
  rect 0.36x0.66 smd paste+0.025 mask+0.025: 1(-0.47,0)
  rect 0.356x0.66 smd mask+0.025: 2(0.47,0)
  body extent -0.56,-0.33 0.55,0.33, height 0.66
20455A20E76 [mm]
  rect 0.25x0.9 smd: 1(-4.75,2.01) 2(-4.25,2.01) 3(-3.75,2.01) 4(-3.25,2.01) 5(-2.75,2.01) 6(-2.25,2.01) 7(-1.75,2.01) 8(-1.25,2.01) 9(-0.75,2.01) 10(-0.25,2.01) 11(0.25,2.01) 12(0.75,2.01) 13(1.25,2.01) 14(1.75,2.01) 15(2.25,2.01) 16(2.75,2.01) 17(3.25,2.01) 18(3.75,2.01) 19(4.25,2.01) 20(4.75,2.01)
  rect 1.4x1.9 smd: MP1(-7.85,-0.81) MP6(7.85,-0.81)
  rect 0.7x1.27 smd: MP2(-7.77,1.555) MP5(7.77,1.555)
  rect 0.55x0.9 smd: MP3(-5.65,2.01) MP4(5.65,2.01)
  silkscreen extent -7,-2.01 7,3, body extent -8.41,-2.01 8.41,2.43, height 1.2
AD936X [mil]
  round 14 smd: A1(-137.01,164.51) A2(-105.51,164.51) A3(-74.02,164.51) A4(-42.52,164.51) A5(-11.02,164.51) A6(20.47,164.51) A7(51.97,164.51) A8(83.46,164.51) A9(114.96,164.51) A10(146.46,164.51) A11(177.95,164.51) A12(209.45,164.51) B1(-137.01,133.01) B2(-105.51,133.01) B3(-74.02,133.01) B4(-42.52,133.01) B5(-11.02,133.01) B6(20.47,133.01) B7(51.97,133.01) B8(83.46,133.01) B9(114.96,133.01) B10(146.46,133.01) B11(177.95,133.01) B12(209.45,133.01) C1(-137.01,101.52) C2(-105.51,101.52) C3(-74.02,101.52) C4(-42.52,101.52) C5(-11.02,101.52) C6(20.47,101.52) C7(51.97,101.52) C8(83.46,101.52) C9(114.96,101.52) C10(146.46,101.52) C11(177.95,101.52) C12(209.45,101.52) D1(-137.01,70.02) D2(-105.51,70.02) D3(-74.02,70.02) D4(-42.52,70.02) D5(-11.02,70.02) D6(20.47,70.02) D7(51.97,70.02) D8(83.46,70.02) D9(114.96,70.02) D10(146.46,70.02) D11(177.95,70.02) D12(209.45,70.02) E1(-137.01,38.52) E2(-105.51,38.52) E3(-74.02,38.52) E4(-42.52,38.52) E5(-11.02,38.52) E6(20.47,38.52) E7(51.97,38.52) E8(83.46,38.52) E9(114.96,38.52) E10(146.46,38.52) E11(177.95,38.52) E12(209.45,38.52) F1(-137.01,7.03) F2(-105.51,7.03) F3(-74.02,7.03) F4(-42.52,7.03) F5(-11.02,7.03) F6(20.47,7.03) F7(51.97,7.03) F8(83.46,7.03) F9(114.96,7.03) F10(146.46,7.03) F11(177.95,7.03) F12(209.45,7.03) G1(-137.01,-24.47) G2(-105.51,-24.47) G3(-74.02,-24.47) G4(-42.52,-24.47) G5(-11.02,-24.47) G6(20.47,-24.47) G7(51.97,-24.47) G8(83.46,-24.47) G9(114.96,-24.47) G10(146.46,-24.47) G11(177.95,-24.47) G12(209.45,-24.47) H1(-137.01,-55.96) H2(-105.51,-55.96) H3(-74.02,-55.96) H4(-42.52,-55.96) H5(-11.02,-55.96) H6(20.47,-55.96) H7(51.97,-55.96) H8(83.46,-55.96) H9(114.96,-55.96) H10(146.46,-55.96) H11(177.95,-55.96) H12(209.45,-55.96) J1(-137.01,-87.46) J2(-105.51,-87.46) J3(-74.02,-87.46) J4(-42.52,-87.46) J5(-11.02,-87.46) J6(20.47,-87.46) J7(51.97,-87.46) J8(83.46,-87.46) J9(114.96,-87.46) J10(146.46,-87.46) J11(177.95,-87.46) J12(209.45,-87.46) K1(-137.01,-118.96) K2(-105.51,-118.96) K3(-74.02,-118.96) K4(-42.52,-118.96) K5(-11.02,-118.96) K6(20.47,-118.96) K7(51.97,-118.96) K8(83.46,-118.96) K9(114.96,-118.96) K10(146.46,-118.96) K11(177.95,-118.96) K12(209.45,-118.96) L1(-137.01,-150.45) L2(-105.51,-150.45) L3(-74.02,-150.45) L4(-42.52,-150.45) L5(-11.02,-150.45) L6(20.47,-150.45) L7(51.97,-150.45) L8(83.46,-150.45) L9(114.96,-150.45) L10(146.46,-150.45) L11(177.95,-150.45) L12(209.45,-150.45) M1(-137.01,-181.95) M2(-105.51,-181.95) M3(-74.02,-181.95) M4(-42.52,-181.95) M5(-11.02,-181.95) M6(20.47,-181.95) M7(51.97,-181.95) M8(83.46,-181.95) M9(114.96,-181.95) M10(146.46,-181.95) M11(177.95,-181.95) M12(209.45,-181.95)
  silkscreen extent -192,-206 233,188, body extent -162,-206 233,189, height 39
CAP_0201 [mm] "0201 capactior"
  rrect25% 0.25x0.35 smd mask+0.025: 1(-0.275,0) 2(0.275,0)
  body extent -0.3,-0.15 0.3,0.15, height 0.33
CAP_0402 [mm]
  rrect25% 0.6x0.7 smd mask+0.025: 1(-0.5,0) 2(0.5,0)
  body extent -0.5,-0.25 0.5,0.25, height 0.55
CAP_0603 [mm]
  rect 0.9x0.8 smd mask+0.025: 1(-0.7,0) 2(0.7,0)
  body extent -0.76,-0.38 0.76,0.38, height 0.91
CLG400 [mm] "BGA, 400-Balls, Body 17x17mm, Pitch 0.8mm"
  round 0.4 smd: A1(-7.6,7.6) A2(-6.8,7.6) A3(-6,7.6) A4(-5.2,7.6) A5(-4.4,7.6) A6(-3.6,7.6) A7(-2.8,7.6) A8(-2,7.6) A9(-1.2,7.6) A10(-0.4,7.6) A11(0.4,7.6) A12(1.2,7.6) A13(2,7.6) A14(2.8,7.6) A15(3.6,7.6) A16(4.4,7.6) A17(5.2,7.6) A18(6,7.6) A19(6.8,7.6) A20(7.6,7.6) B1(-7.6,6.8) B2(-6.8,6.8) B3(-6,6.8) B4(-5.2,6.8) B5(-4.4,6.8) B6(-3.6,6.8) B7(-2.8,6.8) B8(-2,6.8) B9(-1.2,6.8) B10(-0.4,6.8) B11(0.4,6.8) B12(1.2,6.8) B13(2,6.8) B14(2.8,6.8) B15(3.6,6.8) B16(4.4,6.8) B17(5.2,6.8) B18(6,6.8) B19(6.8,6.8) B20(7.6,6.8) C1(-7.6,6) C2(-6.8,6) C3(-6,6) C4(-5.2,6) C5(-4.4,6) C6(-3.6,6) C7(-2.8,6) C8(-2,6) C9(-1.2,6) C10(-0.4,6) C11(0.4,6) C12(1.2,6) C13(2,6) C14(2.8,6) C15(3.6,6) C16(4.4,6) C17(5.2,6) C18(6,6) C19(6.8,6) C20(7.6,6) D1(-7.6,5.2) D2(-6.8,5.2) D3(-6,5.2) D4(-5.2,5.2) D5(-4.4,5.2) D6(-3.6,5.2) D7(-2.8,5.2) D8(-2,5.2) D9(-1.2,5.2) D10(-0.4,5.2) D11(0.4,5.2) D12(1.2,5.2) D13(2,5.2) D14(2.8,5.2) D15(3.6,5.2) D16(4.4,5.2) D17(5.2,5.2) D18(6,5.2) D19(6.8,5.2) D20(7.6,5.2) E1(-7.6,4.4) E2(-6.8,4.4) E3(-6,4.4) E4(-5.2,4.4) E5(-4.4,4.4) E6(-3.6,4.4) E7(-2.8,4.4) E8(-2,4.4) E9(-1.2,4.4) E10(-0.4,4.4) E11(0.4,4.4) E12(1.2,4.4) E13(2,4.4) E14(2.8,4.4) E15(3.6,4.4) E16(4.4,4.4) E17(5.2,4.4) E18(6,4.4) E19(6.8,4.4) E20(7.6,4.4) F1(-7.6,3.6) F2(-6.8,3.6) F3(-6,3.6) F4(-5.2,3.6) F5(-4.4,3.6) F6(-3.6,3.6) F7(-2.8,3.6) F8(-2,3.6) F9(-1.2,3.6) F10(-0.4,3.6) F11(0.4,3.6) F12(1.2,3.6) F13(2,3.6) F14(2.8,3.6) F15(3.6,3.6) F16(4.4,3.6) F17(5.2,3.6) F18(6,3.6) F19(6.8,3.6) F20(7.6,3.6) G1(-7.6,2.8) G2(-6.8,2.8) G3(-6,2.8) G4(-5.2,2.8) G5(-4.4,2.8) G6(-3.6,2.8) G7(-2.8,2.8) G8(-2,2.8) G9(-1.2,2.8) G10(-0.4,2.8) G11(0.4,2.8) G12(1.2,2.8) G13(2,2.8) G14(2.8,2.8) G15(3.6,2.8) G16(4.4,2.8) G17(5.2,2.8) G18(6,2.8) G19(6.8,2.8) G20(7.6,2.8) H1(-7.6,2) H2(-6.8,2) H3(-6,2) H4(-5.2,2) H5(-4.4,2) H6(-3.6,2) H7(-2.8,2) H8(-2,2) H9(-1.2,2) H10(-0.4,2) H11(0.4,2) H12(1.2,2) H13(2,2) H14(2.8,2) H15(3.6,2) H16(4.4,2) H17(5.2,2) H18(6,2) H19(6.8,2) H20(7.6,2) J1(-7.6,1.2) J2(-6.8,1.2) J3(-6,1.2) J4(-5.2,1.2) J5(-4.4,1.2) J6(-3.6,1.2) J7(-2.8,1.2) J8(-2,1.2) J9(-1.2,1.2) J10(-0.4,1.2) J11(0.4,1.2) J12(1.2,1.2) J13(2,1.2) J14(2.8,1.2) J15(3.6,1.2) J16(4.4,1.2) J17(5.2,1.2) J18(6,1.2) J19(6.8,1.2) J20(7.6,1.2) K1(-7.6,0.4) K2(-6.8,0.4) K3(-6,0.4) K4(-5.2,0.4) K5(-4.4,0.4) K6(-3.6,0.4) K7(-2.8,0.4) K8(-2,0.4) K9(-1.2,0.4) K10(-0.4,0.4) K11(0.4,0.4) K12(1.2,0.4) K13(2,0.4) K14(2.8,0.4) K15(3.6,0.4) K16(4.4,0.4) K17(5.2,0.4) K18(6,0.4) K19(6.8,0.4) K20(7.6,0.4) L1(-7.6,-0.4) L2(-6.8,-0.4) L3(-6,-0.4) L4(-5.2,-0.4) L5(-4.4,-0.4) L6(-3.6,-0.4) L7(-2.8,-0.4) L8(-2,-0.4) L9(-1.2,-0.4) L10(-0.4,-0.4) L11(0.4,-0.4) L12(1.2,-0.4) L13(2,-0.4) L14(2.8,-0.4) L15(3.6,-0.4) L16(4.4,-0.4) L17(5.2,-0.4) L18(6,-0.4) L19(6.8,-0.4) L20(7.6,-0.4) M1(-7.6,-1.2) M2(-6.8,-1.2) M3(-6,-1.2) M4(-5.2,-1.2) M5(-4.4,-1.2) M6(-3.6,-1.2) M7(-2.8,-1.2) M8(-2,-1.2) M9(-1.2,-1.2) M10(-0.4,-1.2) M11(0.4,-1.2) M12(1.2,-1.2) M13(2,-1.2) M14(2.8,-1.2) M15(3.6,-1.2) M16(4.4,-1.2) M17(5.2,-1.2) M18(6,-1.2) M19(6.8,-1.2) M20(7.6,-1.2) N1(-7.6,-2) N2(-6.8,-2) N3(-6,-2) N4(-5.2,-2) N5(-4.4,-2) N6(-3.6,-2) N7(-2.8,-2) N8(-2,-2) N9(-1.2,-2) N10(-0.4,-2) N11(0.4,-2) N12(1.2,-2) N13(2,-2) N14(2.8,-2) N15(3.6,-2) N16(4.4,-2) N17(5.2,-2) N18(6,-2) N19(6.8,-2) N20(7.6,-2) P1(-7.6,-2.8) P2(-6.8,-2.8) P3(-6,-2.8) P4(-5.2,-2.8) P5(-4.4,-2.8) P6(-3.6,-2.8) P7(-2.8,-2.8) P8(-2,-2.8) P9(-1.2,-2.8) P10(-0.4,-2.8) P11(0.4,-2.8) P12(1.2,-2.8) P13(2,-2.8) P14(2.8,-2.8) P15(3.6,-2.8) P16(4.4,-2.8) P17(5.2,-2.8) P18(6,-2.8) P19(6.8,-2.8) P20(7.6,-2.8) R1(-7.6,-3.6) R2(-6.8,-3.6) R3(-6,-3.6) R4(-5.2,-3.6) R5(-4.4,-3.6) R6(-3.6,-3.6) R7(-2.8,-3.6) R8(-2,-3.6) R9(-1.2,-3.6) R10(-0.4,-3.6) R11(0.4,-3.6) R12(1.2,-3.6) R13(2,-3.6) R14(2.8,-3.6) R15(3.6,-3.6) R16(4.4,-3.6) R17(5.2,-3.6) R18(6,-3.6) R19(6.8,-3.6) R20(7.6,-3.6) T1(-7.6,-4.4) T2(-6.8,-4.4) T3(-6,-4.4) T4(-5.2,-4.4) T5(-4.4,-4.4) T6(-3.6,-4.4) T7(-2.8,-4.4) T8(-2,-4.4) T9(-1.2,-4.4) T10(-0.4,-4.4) T11(0.4,-4.4) T12(1.2,-4.4) T13(2,-4.4) T14(2.8,-4.4) T15(3.6,-4.4) T16(4.4,-4.4) T17(5.2,-4.4) T18(6,-4.4) T19(6.8,-4.4) T20(7.6,-4.4) U1(-7.6,-5.2) U2(-6.8,-5.2) U3(-6,-5.2) U4(-5.2,-5.2) U5(-4.4,-5.2) U6(-3.6,-5.2) U7(-2.8,-5.2) U8(-2,-5.2) U9(-1.2,-5.2) U10(-0.4,-5.2) U11(0.4,-5.2) U12(1.2,-5.2) U13(2,-5.2) U14(2.8,-5.2) U15(3.6,-5.2) U16(4.4,-5.2) U17(5.2,-5.2) U18(6,-5.2) U19(6.8,-5.2) U20(7.6,-5.2) V1(-7.6,-6) V2(-6.8,-6) V3(-6,-6) V4(-5.2,-6) V5(-4.4,-6) V6(-3.6,-6) V7(-2.8,-6) V8(-2,-6) V9(-1.2,-6) V10(-0.4,-6) V11(0.4,-6) V12(1.2,-6) V13(2,-6) V14(2.8,-6) V15(3.6,-6) V16(4.4,-6) V17(5.2,-6) V18(6,-6) V19(6.8,-6) V20(7.6,-6) W1(-7.6,-6.8) W2(-6.8,-6.8) W3(-6,-6.8) W4(-5.2,-6.8) W5(-4.4,-6.8) W6(-3.6,-6.8) W7(-2.8,-6.8) W8(-2,-6.8) W9(-1.2,-6.8) W10(-0.4,-6.8) W11(0.4,-6.8) W12(1.2,-6.8) W13(2,-6.8) W14(2.8,-6.8) W15(3.6,-6.8) W16(4.4,-6.8) W17(5.2,-6.8) W18(6,-6.8) W19(6.8,-6.8) W20(7.6,-6.8) Y1(-7.6,-7.6) Y2(-6.8,-7.6) Y3(-6,-7.6) Y4(-5.2,-7.6) Y5(-4.4,-7.6) Y6(-3.6,-7.6) Y7(-2.8,-7.6) Y8(-2,-7.6) Y9(-1.2,-7.6) Y10(-0.4,-7.6) Y11(0.4,-7.6) Y12(1.2,-7.6) Y13(2,-7.6) Y14(2.8,-7.6) Y15(3.6,-7.6) Y16(4.4,-7.6) Y17(5.2,-7.6) Y18(6,-7.6) Y19(6.8,-7.6) Y20(7.6,-7.6)
  silkscreen extent -9.09,-8.5 8.5,9, body extent -8.5,-8.5 8.5,8.5, height 1.6
DSB221SDN48000MHZ [mm]
  rect 0.75x0.85 smd: 1(-0.975,-0.675) 2(0.975,-0.675) 3(0.975,0.675) 4(-0.975,0.675)
  silkscreen extent -1.02,-1.7 0.2,1, body extent -1.28,-1.02 1.28,1.02, height 1
FP-73415-0961-MFG [mm]
  rect 2.6x0.914 smd paste+0 mask+0: 1(3.985,0)
  round 1.395 smd paste+0 mask+0: 2(3.21,1.525) 3(3.21,-1.525)
  Top Layer region: -1.362,-1.75 -1.362,-2.3 5.285,-2.3 5.285,-0.75 2.285,-0.75 2.285,-1.75
  Top Layer region: -1.362,1.75 -1.362,2.3 5.285,2.3 5.285,0.75 2.285,0.75 2.285,1.75
  Keep-Out Layer region: -1.349,-1.684 2.221,-1.684 2.221,1.676 -1.349,1.676
  body extent -2.32,-2.4 5.39,2.4, height 0.25
FP-BLM18-0_15-t0_8-MFG [mm]
  rect 0.65x0.7 smd paste+0 mask+0: 1(-0.675,0) 2(0.675,0)
  body extent -1.1,-0.57 1.1,0.57, height 0.25
FP-BQB0016A-MFG [mm]
  rrect42% 0.24x0.6 smd paste+0 mask+0: 1(-0.25,1.65) 8(-0.25,-1.65) 9(0.25,-1.65) 16(0.25,1.65)
  rrect42% 0.6x0.24 smd paste+0 mask+0: 2(-1.15,1.25) 3(-1.15,0.75) 4(-1.15,0.25) 5(-1.15,-0.25) 6(-1.15,-0.75) 7(-1.15,-1.25) 10(1.15,-1.25) 11(1.15,-0.75) 12(1.15,-0.25) 13(1.15,0.25) 14(1.15,0.75) 15(1.15,1.25)
  rrect10% 1x2 smd paste-1000 mask+0: 17(0,0)
  silkscreen extent -1.3,-1.8 1.3,2.63, body extent -1.55,-2.05 1.55,2.05, height 0.25
FP-DFE201610C-MFG [mm]
  rect 0.8x1.8 smd paste+0 mask+0: 1(-0.8,0) 2(0.8,0)
  silkscreen extent -0.03,-0.9 0.03,0.9, body extent -1,-0.8 1,0.8, height 1
FP-GRM033-0_03-IPC_C [mm]
  rect 0.354x0.263 smd paste+0 mask+0: 1(-0.254,0) 2(0.254,0)
  body extent -0.3,-0.15 0.3,0.15, height 0.33
FP-LTST-C190GKT-MFG [mm]
  rect 0.8x0.8 smd paste+0 mask+0: 1(-0.75,0) 2(0.75,0)
  body extent -1.25,-0.55 1.25,0.55, height 0.25
FP-TPEB2-MFG [mm]
  rect 1.6x2.7 smd paste+0 mask+0: 1(-1.5,0) 2(1.5,0)
  silkscreen extent -0.33,-1.5 0.33,1.5, body extent -1.75,-1.4 1.75,1.4, height 2
HDR1 [mm]
  rect 1.905x1.016 smd: 1(1.1,0.6)
MICT-HA-96 [mm] "BGA, 96-Balls, Body 14x9mm, Pitch 0.8mm"
  round 0.4 smd: A1(-3.2,6) A2(-2.4,6) A3(-1.6,6) A7(1.6,6) A8(2.4,6) A9(3.2,6) B1(-3.2,5.2) B2(-2.4,5.2) B3(-1.6,5.2) B7(1.6,5.2) B8(2.4,5.2) B9(3.2,5.2) C1(-3.2,4.4) C2(-2.4,4.4) C3(-1.6,4.4) C7(1.6,4.4) C8(2.4,4.4) C9(3.2,4.4) D1(-3.2,3.6) D2(-2.4,3.6) D3(-1.6,3.6) D7(1.6,3.6) D8(2.4,3.6) D9(3.2,3.6) E1(-3.2,2.8) E2(-2.4,2.8) E3(-1.6,2.8) E7(1.6,2.8) E8(2.4,2.8) E9(3.2,2.8) F1(-3.2,2) F2(-2.4,2) F3(-1.6,2) F7(1.6,2) F8(2.4,2) F9(3.2,2) G1(-3.2,1.2) G2(-2.4,1.2) G3(-1.6,1.2) G7(1.6,1.2) G8(2.4,1.2) G9(3.2,1.2) H1(-3.2,0.4) H2(-2.4,0.4) H3(-1.6,0.4) H7(1.6,0.4) H8(2.4,0.4) H9(3.2,0.4) J1(-3.2,-0.4) J2(-2.4,-0.4) J3(-1.6,-0.4) J7(1.6,-0.4) J8(2.4,-0.4) J9(3.2,-0.4) K1(-3.2,-1.2) K2(-2.4,-1.2) K3(-1.6,-1.2) K7(1.6,-1.2) K8(2.4,-1.2) K9(3.2,-1.2) L1(-3.2,-2) L2(-2.4,-2) L3(-1.6,-2) L7(1.6,-2) L8(2.4,-2) L9(3.2,-2) M1(-3.2,-2.8) M2(-2.4,-2.8) M3(-1.6,-2.8) M7(1.6,-2.8) M8(2.4,-2.8) M9(3.2,-2.8) N1(-3.2,-3.6) N2(-2.4,-3.6) N3(-1.6,-3.6) N7(1.6,-3.6) N8(2.4,-3.6) N9(3.2,-3.6) P1(-3.2,-4.4) P2(-2.4,-4.4) P3(-1.6,-4.4) P7(1.6,-4.4) P8(2.4,-4.4) P9(3.2,-4.4) R1(-3.2,-5.2) R2(-2.4,-5.2) R3(-1.6,-5.2) R7(1.6,-5.2) R8(2.4,-5.2) R9(3.2,-5.2) T1(-3.2,-6) T2(-2.4,-6) T3(-1.6,-6) T7(1.6,-6) T8(2.4,-6) T9(3.2,-6)
  silkscreen extent -5.27,-7 4.5,7, body extent -4.5,-7 4.5,7, height 0.1
MOLX-104031-0811_V [mm] "Micro SD, 8-Leads, Body 11.95x11.4mm, Pitch 1.1mm"
  rect 0.85x1.1 smd: 1(3.113,-5.412) 2(2.013,-5.412) 3(0.913,-5.412) 4(-0.188,-5.412) 5(-1.288,-5.412) 6(-2.387,-5.412) 7(-3.487,-5.412)
  rect 0.75x1.1 smd: 8(-4.537,-5.412)
  rect 1.2x1 smd: 9(5.747,0.738) 10(5.748,4.438)
  rect 1.55x1.35 smd: 11(5.573,-5.287)
  rect 1.17x1.8 smd: 12(-5.747,-5.063)
  rect 1.9x1.27 smd: 13(-3.722,5.413)
  rect 1.9x1.35 smd: 14(2.248,5.413)
  silkscreen extent 2.99,-6.64 3.24,-6.39, body extent -5.97,-5.66 5.98,5.74, height 1.45
NCS163 [mm]
  rect 0.36x0.6 smd mask+0.025: 1(-0.66,-0.9) 2(0,-0.9) 3(0.66,-0.9) 4(0.66,0.9) 5(0,0.9) 6(-0.66,0.9)
  silkscreen extent -0.71,-1.9 -0.61,-1.8, body extent -1,-1.36 1,1.36, height 1.17
RES_0201 [mm] "0201 resistor"
  rrect25% 0.25x0.35 smd mask+0.025: 1(-0.275,0) 2(0.275,0)
  body extent -0.29,-0.15 0.29,0.15, height 0.23
RES_0402 [mm]
  rrect25% 0.6x0.7 smd mask+0.025: 1(-0.5,0) 2(0.5,0)
  body extent -0.5,-0.25 0.5,0.25, height 0.35
SIL0008D_V [mm] "PSON, 8-Leads, Body 3.00x2.80mm, Pitch 0.65mm, Thermal Pad 1.90x1.1mm"
  rect 0.5x0.4 smd: 1(-1.05,0.975) 2(-1.05,0.325) 3(-1.05,-0.325) 4(-1.05,-0.975) 5(1.05,-0.975) 6(1.05,-0.325) 7(1.05,0.325) 8(1.05,0.975)
  rect 1.1x1.9 smd: 9(0,0)
  silkscreen extent -1.4,-1.58 1.4,1.95, body extent -1.4,-1.5 1.4,1.5, height 1.53
SKY8574711 [mm]
  rect 0.55x0.35 smd mask+0.025: 1(-2.425,0.75) 2(-2.425,0.25) 3(-2.425,-0.25) 4(-2.425,-0.75) 13(2.425,-0.75) 14(2.425,-0.25) 15(2.425,0.25) 16(2.425,0.75)
  rect 0.35x0.55 smd mask+0.025: 5(-1.75,-1.425) 6(-1.25,-1.425) 7(-0.75,-1.425) 8(-0.25,-1.425) 9(0.25,-1.425) 10(0.75,-1.425) 11(1.25,-1.425) 12(1.75,-1.425) 17(1.75,1.425) 18(1.25,1.425) 19(0.75,1.425) 20(0.25,1.425) 21(-0.25,1.425) 22(-0.75,1.425) 23(-1.25,1.425) 24(-1.75,1.425)
  rect 3.8x1.8 smd: 25(0,0)
  silkscreen extent -3.3,0.7 -3.2,0.8, body extent -2.5,-1.5 2.5,1.5, height 1.1
"TEST 0.8" [mm] "测试点0.8mm"
  round 0.8 smd: 1(0,0)

## Part data
C1 C2 C3 C4 C5 C6 C7 C8 C9 C10 C11 C12 C13 C14 C15 C16 C17 C18 C19 C20 C21 C22 C23 C24 C25 C26 C27 C28 C29 C30 C31 C32 C33 C34 C35 C36 C41 C43 C44 C45 C46 C47 C48 C49 C50 C51 C52 C53 C54 C55 C56 C57 C58 C59 C60 C61 C62 C63 C88 C100 C101 C102 C103 C104 C107 C108 C109 C110 C111 C112 C113 C114 C115 C116 C117 C118 C119 C120 C121 C122 C123 C124 C125 C126 C127 C128 C129 C139 C140 C141 C142 C143 C146 C147 C148 C149 C150 C153 C154 C155 C156 C157 C158 C159: library part C, "无极性贴片电容", BOM名称=无极性贴片电容, 学习资源=www.ooocke.com, 版权归属=源创客
C37 C38 C39 C40 C42 C64 C65 C66 C67 C68 C69 C70 C71 C72 C73 C74 C75 C76 C77 C78 C79 C80 C81 C82 C83 C84 C85 C86 C87 C89 C90 C91 C92 C93 C94 C95 C96 C97 C98 C99 C105 C106 C130 C131 C132 C133 C134 C135 C136 C137 C138 C151 C152: library part CMP-2010-01264-2, "Chip Multilayer Ceramic Capacitors for General Purpose, 0201, 0.10uF, X5R, 15%, 10%, 10V", Capacitance=100nF, Case Code (Imperial)=0201, Case Code (Metric)=0603, Dielectric=X5R, Max Operating Temperature=85°C, Min Operating Temperature=-55°C, Package Quantity=1, Tolerance=10%, Voltage=10V, Case/Package=0201, Depth=0.3mm, Height=0.3mm, Lead Free="Lead Free", Length=0.6mm, Mount="Surface Mount", Packaging="Tape and Reel", Radiation Hardening=No, REACH SVHC="No SVHC", Termination=SMD/SMT, Thickness=0.013inch, Voltage Rating=10V, Voltage Rating (DC)=10V, Weight=6E-06oz, Width=0.012inch
C144 C145: library part CMP-05429-000001-1, "CAP TANT POLY 220UF 6.3V 1411", Capacitance=220uF, Case Code (Imperial)=1411, Case Code (Metric)=3528, Case/Package=Molded, ESR (Equivalent Series Resistance)=35mR, Leakage Current=138.6uA, Max Operating Temperature=105°C, Min Operating Temperature=-55°C, Package Quantity=2000, Ripple Current=1.4A, Tolerance=20%, Voltage=6.3V, Depth=2.8mm, Dissipation Factor=10%, Features="General Purpose", Height=1.9mm, Height - Seated (Max)=0.079inch, Lead Free="Lead Free", Length=3.5mm, Mount="Surface Mount", Number of Pins=2, Packaging="Tape and Reel", Polarity=Polar, Radiation Hardening=No, REACH SVHC="No SVHC", Termination=SMD/SMT, Voltage Rating=6.3V, Voltage Rating (DC)=6.3V, Width=0.11inch
D1 D2 D3 D4 D5 D6: library part CMP-22017-000005-2, "LED GREEN CLEAR CHIP SMD", Case Code (Imperial)=0603, Case Code (Metric)=1608, Color=Green, Forward Current=30mA, Forward Voltage=2.1V, Lens Color=Colorless, Max Operating Temperature=85°C, Min Operating Temperature=-55°C, Package Quantity=1, Power Dissipation=100mW, Reverse Voltage=5V, Test Current=10mA, Voltage=2V, Case/Package=0603, Depth=0.8mm, Dominant Wavelength=569nm, Height=0.8mm, Illumination Color=Green, Lead Free="Lead Free", Length=1.6mm, Lens Style=Clear, Lens Transparency=Clear, Luminous Intensity=6mcd, Mount="Surface Mount", Number of Elements=1, Number of LEDs=1, Number of Pins=2, Packaging="Tape and Reel", Power Rating=100mW, Radiation Hardening=No, Viewing Angle=130°, Wavelength=565nm, Width=0.8mm
FB1: library part BLM15PX331SN1D, "330 Ohms @ 100 MHz 1 Power Line Ferrite Bead 0402 (1005 Metric) 1.2A 150mOhm from Murata Electronics", BOM_Manufacturer="Murata Electronics", BOM_Manufacturer Part=BLM15PX331SN1D, BOM_Supplier=LCSC, BOM_Supplier Part=C160975, Contributor=LCSC, spicePre=U, spiceSymbolName=BLM15PX331SN1D
FB2 FB3 FB5 FB6: "330 Ohms @ 100 MHz 1 Power Line Ferrite Bead 0402 (1005 Metric) 1.2A 150mOhm from Murata Electronics", BOM_Manufacturer="Murata Electronics", BOM_Manufacturer Part=BLM15PX331SN1D, BOM_Supplier=LCSC, BOM_Supplier Part=C160975, Contributor=LCSC, spicePre=U, spiceSymbolName=BLM15PX331SN1D
FB4: library part CMP-0686-00587-3, "Chip Ferrite Bead, 0603, 470Ω @ 100MHz, 0.2Ω, 25%, 1A", Case Code (Imperial)=0603, Case Code (Metric)=1608, Current Rating=1A, DC Resistance (DCR)=200mR, Max Operating Temperature=125°C, Min Operating Temperature=-55°C, Package Quantity=1, Test Frequency=100MHz, Tolerance=25%, Case/Package=0603, Core Material=Ferrite, DC Current=1A, DC Resistance-Max=200mR, Depth=0.8mm, Height=0.8mm, Impedance=470R, Lead Free="Lead Free", Length=1.6mm, Material=Steel, Max Current Rating=1A, Max DC Current=1A, Military Standard=Not, Number Of Circuits=1, Number of Lines=1, Number of Pins=2, Packaging="Tape and Reel", Radiation Hardening=No, REACH SVHC="No SVHC", Resistance=200mR, RoHS Compliant=Yes, Series=BLM18P, Termination=SMD/SMT, Width=0.8mm
J1 J2: "Connector", Manufacturer_Name=I-Pex, Datasheet Link=https://www.i-pex.com/sites/default/files/downloads/pdf/2D_CABLINE-VS_RECEPTACLE_20455C30.pdf, Height=1.1mm, Manufacturer_Part_Number=20455-A20E-76
J3: library part CMP-00257-01481145-1, "73415-0961 RF MMCX Connector, 1 Contact(s), Female, Board Mount, Surface Mount Terminal, Receptacle", Frequency=6GHz, Insulation Resistance=10GΩ, Max Operating Temperature=155°C, Min Operating Temperature=-55°C, Voltage Rating=170V, Body Plating=Gold, Connector Type="Coaxial, Connector, MMCX", Contact Material=Copper, Contact Plating=Gold, Gender=Female, Halogen Free="Low Halogen", Impedance=50Ω, Lead Free="Lead Free", Max Frequency=6GHz, Mount=Edge, NexarPartId=1481145, Orientation="Right Angle", Packaging=Bulk, Plating=Gold, Radiation Hardening=No, REACH SVHC=Unknown, RoHS=Compliant, Termination=Solder
L1 L4: library part 0402DC-36NXJRW, "Inductor", Manufacturer_Name=COILCRAFT, Mouser Part Number=994-0402DC-36NXJRW, Datasheet Link=https://componentsearchengine.com/Datasheets/1/0402DC-36NXJRW.pdf, Height=0.65mm, Manufacturer_Part_Number=0402DC-36NXJRW, Mouser Price/Stock=https://www.mouser.co.uk/ProductDetail/Coilcraft/0402DC-36NXJRW?qs=wnTfsH77Xs5b4nmRQW6u0w%3D%3D
L2: library part CMP-06042-015199-1, "0.24uh"
R1 R2 R8 R21 R22 R23 R24 R25 R26 R27 R31 R32 R34 R35 R36 R37 R38 R39 R40 R41 R42 R43 R44 R45 R46 R47 R48 R49 R50 R51 R52 R53 R54 R55 R56 R57 R62 R63 R64 R65 R66 R68 R69 R71 R72 R73 R74 R75 R76 R77 R78 R79 R80 R81 R82 R83 R84 R85 R86 R87 R88 R89 R90 R91 R92 R93 R94 R95: library part R, "贴片电阻", BOM名称=贴片电阻, 学习资源=www.ooocke.com, 版权归属=源创客
R9 R10 R11 R12 R13 R14 R15 R16 R17 R18 R19 R20 R28 R29 R30 R33 R58 R59 R60 R61: library part RES
SD1: library part CMP-2000-05825-1, "Micro SD Card, RA, -25 to 85 degC, 8-Pin SMD, RoHS, Tape and Reel", Current Rating=500mA, Manufacturer=Molex, Package Description="8-Pin Surface Mount Device, Body 11.95 x 11.4 mm, Pitch 1.1 mm", Voltage Rating=10VAC/DC, Brand=Molex, Card Type=microSD, Contact Material=PhosphorBronze, Contact Plating=Gold, Datasheet URL=http://www.molex.com/pdm_docs/sd/1040310811_sd.pdf, Datasheet Version="Rev. E, 04/2006", Height=1.42mm, Housing Material=LiquidCrystalPolymer(LCP), Insertion - Extraction Style=Push-Pull, Length=11.4mm, Manufacturer URL=http://www.molex.com/, Mating Cycles=10000, Mounting Technology=SurfaceMount, Mounting Type=Standard, Number of Contacts=8, Number of Rows=1Row, Orientation=RightAngle, Package Reference=104031-0811, Packaging=Reel, Pitch=1.1mm, Product=CardConnectors, Product Category=MemoryCardConnectors, RoHS=True, Series=104031, Termination Style=SMD
T1 T2: "Transformer", Manufacturer_Name=Mini-Circuits, Mouser Part Number=139-NCS1-63, Datasheet Link=https://www.minicircuits.com/pdfs/NCS1-63+.pdf, Height=1.0686mm, Manufacturer_Part_Number=NCS1-63+, Mouser Price/Stock=https://www.mouser.co.uk/ProductDetail/Mini-Circuits/NCS1-63%2b?qs=xZ%2FP%252Ba9zWqbvv4L0HdNEiw%3D%3D
TP1 TP2 TP3 TP5 TP6 TP8: "测试点", BOM名称=测试点, 学习资源=www.ooocke.com, 版权归属=源创客
U1: library part AD9363
U2: library part CMP-04899-000100-1, "IC TRANSCEIVER HALF 4/4 16WQFN"
U3: library part CMP-2000-04968-1, "4 Gb DDR3-1600 SDRAM, 256 Mb x 16, 1.25 ns, 1.5 V, 0 to 95 degC, 96-Ball FBGA, Pb-Free", Manufacturer=Micron, Operating Supply Voltage=1.5V, Operating Temperature=0to95degC, Package=96FBGA, Package Description="96-Ball Fine-Pitch Ball Grid Array, Body 14 x 9 mm, Pitch 0.8 mm", Package Reference=HA-96, Address Bus Width=18Bit, Data Bus Width=16Bit, Datasheet URL=http://passthrough.fw-notify.net/download/888500/http://download.siliconexpert.com/pdfs/2013/4/14/9/8/34/442/mic_/manual/234gb_ddr3_sdram.pdf, Datasheet Version="Rev. M, 04/2013", Density=4Gb, Manufacturer URL=https://www.micron.com/, Maximum Clock Rate=1600MHz, Number of Bits per Word=16Bit, Rad Hard=No, Type=DDR3SDRAM
U4: library part CMP-0363-00008-3, "667 MHz Zynq™-7000 AP SoC, 130 PS I/O, 100 FPGA I/O, 400-Ball BGA, Speed Grade 1, Industrial Grade, Pb-Free", Generic Part Number=XC7Z010, Code_JEDEC=MO-275-MMAA-1, ComponentLink1Description=Datasheet, ComponentLink1URL=http://www.xilinx.com/support/documentation/data_sheets/ds190-Zynq-7000-Overview.pdf, ComponentLink2Description="Package Specification", ComponentLink2URL=http://www.xilinx.com/support/documentation/user_guides/ug865-Zynq-7000-Pkg-Pinout.pdf, ComponentLink3Description="DC and AC Switching Characteristics", ComponentLink3URL=http://www.xilinx.com/support/documentation/data_sheets/ds187-XC7Z010-XC7Z020-Data-Sheet.pdf, ComponentLink4Description="Package File", ComponentLink4URL=http://www.xilinx.com/support/packagefiles/z7packages/xc7z010clg400pkg.txt, ComponentLink5Description="Packaging and Pinout", ComponentLink5URL=http://www.xilinx.com/support/documentation/user_guides/ug865-Zynq-7000-Pkg-Pinout.pdf, ComponentLink6Description="PCB and Layout Guide", ComponentLink6URL=http://www.xilinx.com/support/documentation/user_guides/ug483_7Series_PCB.pdf, DatasheetVersion=v1.2, Extensible Block RAM (# 36Kb Blocks)="240 KB (60)", Flip Flops=35200, LUTs=17600, Mounting Technology="Surface Mount", PackageDescription="Wire-Bond Chip-Scale BGA, Body 17 x 17 mm, 0.8 mm Pitch", PackageReference=CLG400, PackageVersion="Rev 1.1, 09/2012", PartNumber=XC7Z010-1CLG400I, RoHS=Pb-Free, Speed Grade=-1
U5: "Integrated Circuit", Manufacturer_Name=Skyworks, Mouser Part Number=N/A, Datasheet Link=https://www.skyworksinc.com/-/media/D3029C8735D243D49E5D7B71E89CB849.pdf, Height=1mm, Manufacturer_Part_Number=SKY85747-11, Mouser Price/Stock=https://www.mouser.co.uk/ProductDetail/Skyworks-Solutions-Inc/SKY85747-11?qs=rkhjVJ6%2F3EJ7jYNOizWTJw%3D%3D
U6 U7 U8 U9 U11: library part CMP-2000-07569-1, "Step-Down Converter MicroSiP(TM) Module with Integrated Inductor, 3 A, 3 to 17 V, -40 to 125 degC, 8-Pin uSiP (SIL), Tape and Reel", Case/Package=SMD/SMT, Manufacturer="Texas Instruments", Max Input Voltage=17V, Max Operating Temperature=125degC, Max Output Current=3A, Max Output Voltage=5V, Min Input Voltage=3V, Min Operating Temperature=-40degC, Min Output Voltage=900mV, Package Description="8-Pin Single In-line Package, Body 3 x 2.8 mm, Pitch 0.65 mm", Package Reference=SIL0008D, Quiescent Current=20uA, Switching Frequency=2MHz, Datasheet URL=http://www.ti.com/lit/ds/symlink/tps82130.pdf, Datasheet Version="Rev. C, 01/2017", Height=0.06inch, Lead Free=LeadFree, Length=0.12inch, Manufacturer URL=http://www.ti.com/, Mount=SurfaceMount, Mounting Technology=SurfaceMount, Number Of Outputs=1, Number of Pins=8, Output Current=3A, Output Voltage=5V, Packaging=CutTape, REACH SVHC=NoSVHC, RoHSCompliant=True, Voltage - Output 1=5V, Width=0.11inch
Y1 Y2: "Crystal or Oscillator", Manufacturer_Name=Daishinku, Datasheet Link=http://ftp.kds.info/products/DSA_DSBxxxSDN_SDNB_en.pdf, Height=0.9mm, Manufacturer_Part_Number=DSB221SDN-48.000MHZ

## Via types
v1: diameter 0.4, hole 0.3, Top Layer to Bottom Layer, tented both sides, 609 vias
v2: diameter 0.45, hole 0.3, Top Layer to Bottom Layer, tented both sides, 85 vias
v3: diameter 0.5, hole 0.3, Top Layer to Bottom Layer, tented both sides, 13 vias
v4: diameter 0.5, hole 0.3, Top Layer to Bottom Layer, 2 vias

## Nets (pads, with @x,y where several pads share a name; then routed paths per layer and width w, separated by ;. In a path a pad name is that pad's centre, name@x,y a point inside that pad or via, vN(x,y) a via of type N, cw(c..) or ccw(c..) an arc to the next point about the centre after c; other vN are vias at no path point)
1P3V_A: C11.2 C14.2 C17.2 C20.2 C89.1 C90.1 C91.1 C92.1 C111.1 C112.2 C118.1 C119.2 C120.1 C121.2 FB2.2 L1.1 L4.1 R7.2 U1.A7 U1.A8 U1.A9 U1.A10 U1.B8 U1.D2 U1.D3 U1.E3 U1.F12 U1.K4 U1.M9 U1.M10 | length 2.2
  Top Layer w0.254: C20.2@76.763,114.389 C20.2@76.899,114.389 ; L4.1@77.466,114.383 77.463,114.386 v1(76.902,114.386) ; L1.1@79.929,114.375 v1(79.979,114.375) ; L1.1@79.93,114.383 79.962,114.351 79.978,114.367 80.624,114.367 C14.2@80.64,114.351 ; C20.2@76.899,114.389 v1(76.902,114.386) ; C20.2@76.899,114.389 v1(76.902,114.386)
  Bottom Layer w0.254: v1(79.095,104.496) 79.172,104.42 C17.2@79.172,103.848
  other v1: 76.695,104.496 77.495,104.496 78.295,104.496 78.295,105.296 82.295,106.896 83.095,106.896 82.295,107.697 75.095,108.496 81.495,111.696 76.695,113.296 77.495,113.296
1P3V_B: C115.1 C116.2 C122.1 C123.2 C124.1 C125.2 FB3.2 U1.B9 U1.B10 U1.E2 U1.F2 U1.J3 U1.K3 | length 1.6
  Bottom Layer w0.254: FB3.2@75.895,105.25 75.942,105.296 v1(77.495,105.296)
  other v1: 76.695,105.296 83.095,107.697 83.095,108.496 82.295,110.896 82.295,111.696
+1.0: C2.1 C25.1 C26.1 C27.2 C36.1 C37.1 C38.1 C39.1 C40.1 C42.1 C64.1 C65.1 C66.1 C67.1 C68.1 C69.1 C78.1 C79.1 C80.1 C81.1 C82.1 R10.1 TP3.1 U4.G7 U4.G11 U4.G13 U4.H10 U4.H12 U4.J7 U4.J13 U4.K12 U4.L7 U4.L13 U4.M12 U4.N7 U4.N13 U4.P8 U4.P12 U4.R7 U4.R13 U6.4 U6.5 | length 4.3
  Top Layer w0.356: U6.4@51.456,101.494 51.469,101.494 51.491,101.472 51.491,100.792 v2(51.505,100.778) 51.514,100.769 v2(52.502,100.769) 52.514,100.781 53.529,100.781 v2(53.535,100.787) 53.54,100.791 53.54,101.478 U6.5@53.556,101.494
  Bottom Layer w0.356: v1(67.387,115.124) 68.172,115.124 TP3.1@68.174,115.126
  other v1: 62.587,108.724 67.387,108.724 63.387,109.524 66.587,109.524 62.587,110.324 67.387,110.324 66.587,111.124 62.587,111.924 67.387,111.924 66.587,112.724 62.587,113.524 67.387,113.524 64.987,114.324 66.587,114.324 62.587,115.124 65.787,115.124
  other v2: 51.981,100.228 52.997,100.216 55.44,101.943
+1.3: C12.1 C109.1 C110.2 C113.1 C114.2 FB2.1 FB3.1 L2.2 TP1.1 | length 14.2
  Top Layer w0.305: v1(81.871,103.402) 81.871,103.377 82.434,103.377 82.468,103.411 C12.1@83.028,103.411 ; C12.1@83.028,103.416 C12.1@83.028,103.411 ; C12.1@83.036,103.411 C12.1@83.031,103.411 ; v1(83.036,103.416) C12.1@83.031,103.411 ; C12.1@83.028,103.411 C12.1@83.031,103.411
  Bottom Layer w0.305: FB3.1@75.857,104.237 75.857,103.297 C113.1@75.836,103.276 75.881,103.232 81.304,103.232 81.473,103.401 81.869,103.401 v1(81.871,103.402) 82.202,103.402 ; FB2.1@80.662,105.346 81.712,105.347 82.202,104.856 82.202,103.405 v1(82.434,103.405) ; v1@82.436,103.403 C110.2@83.012,103.403 ; C110.2@83.012,103.45 C110.2@83.058,103.45 83.036,103.427 v1(83.036,103.416) ; L2.2@84.633,103.695 84.861,103.924 TP1.1@84.861,105.08
+1.5: C5.2 C6.1 C19.1 C44.1 C45.1 C46.1 C47.1 C48.1 C49.1 C50.1 C51.1 C52.1 C53.1 C93.1 C94.1 C95.1 C96.1 C97.1 C98.1 C99.1 C101.2 R19.1 R23.1 R24.1 TP8.1 U3.A1 U3.A8 U3.B2 U3.C1 U3.C9 U3.D2 U3.D9 U3.E9 U3.F1 U3.G7 U3.H2 U3.H9 U3.K2 U3.K8 U3.N1 U3.N9 U3.R1 U3.R9 U4.A3 U4.D2 U4.E5 U4.G1 U4.H4 U4.L3 U4.P2 U4.R5 U4.U1 U4.V4 U9.4 U9.5 | length 18.9